# Altium PCB PCB1.PcbDoc (part 1 of 3)
Units mil, origin at the board's own origin, x right, y up, seen from the top; angles counter-clockwise.
Board outline 8600 x 11100 mil, 4 copper layers (CAPA1, GND, VCC, Capa2), stack 94.024 mil thick; 162 components, 68 nets, 413 pads, 138 vias.
Unrouted connection lines stored in the file: 33.
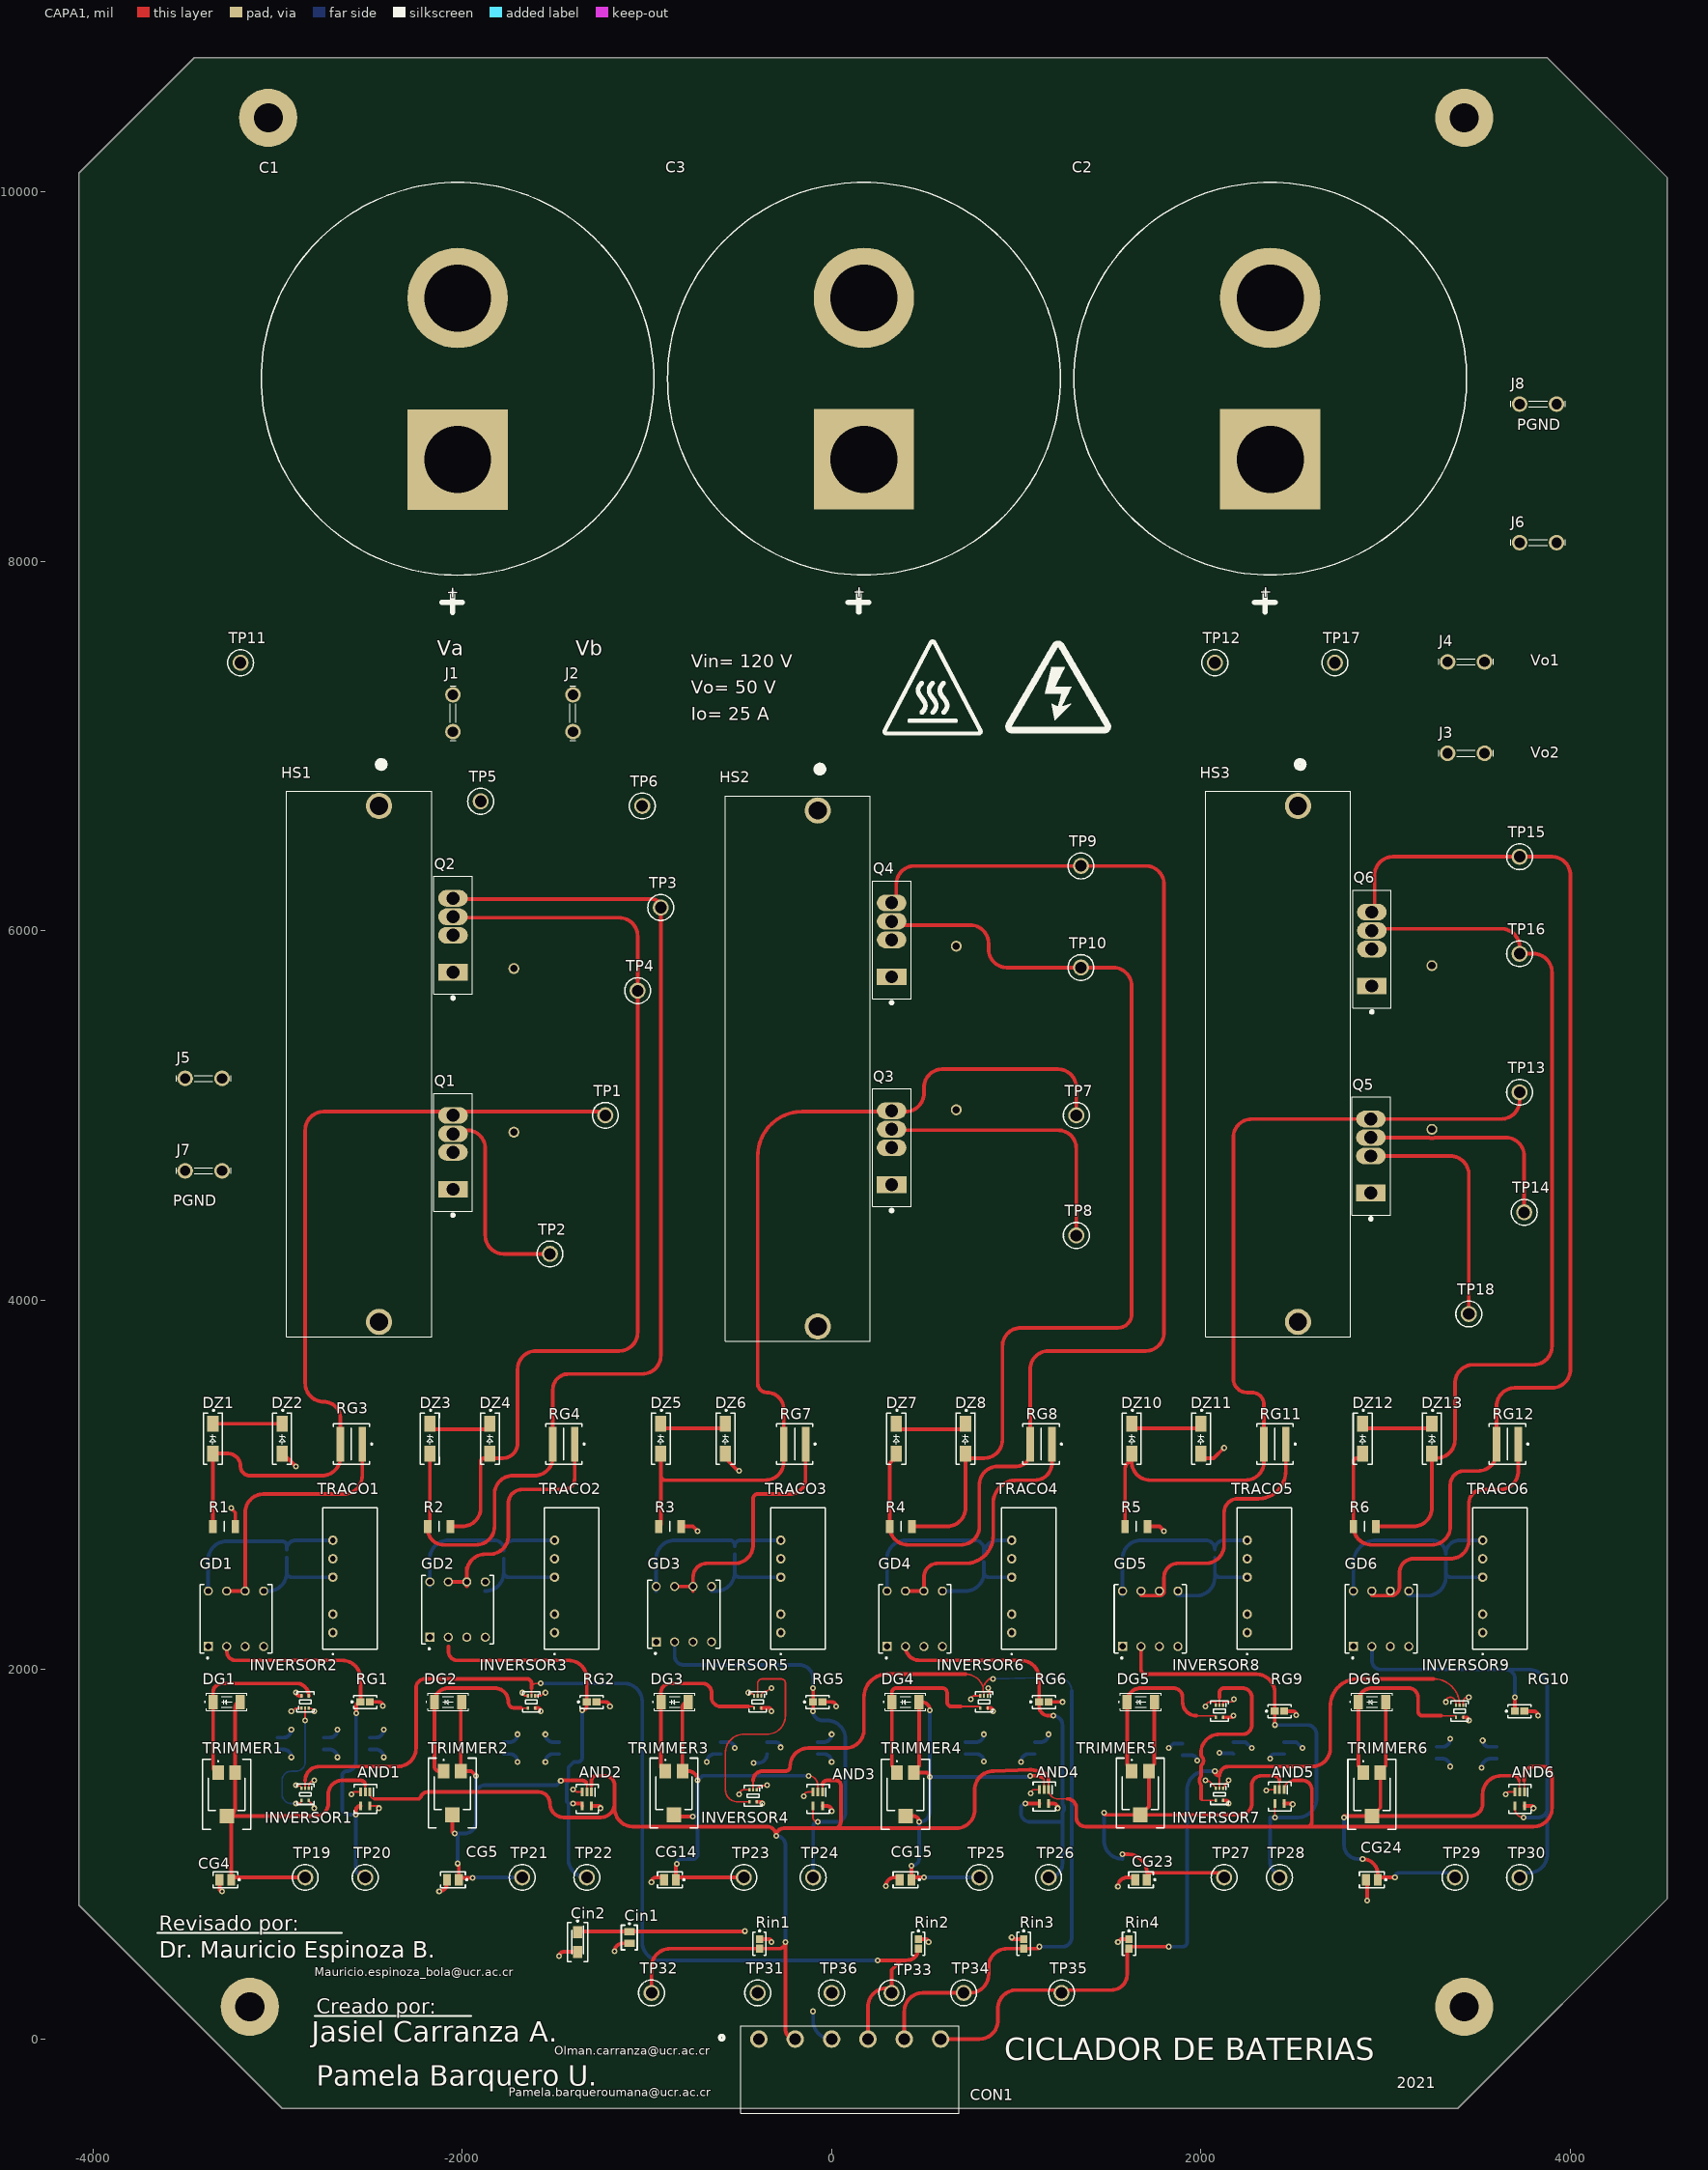
[diagram p0: CAPA1 view]
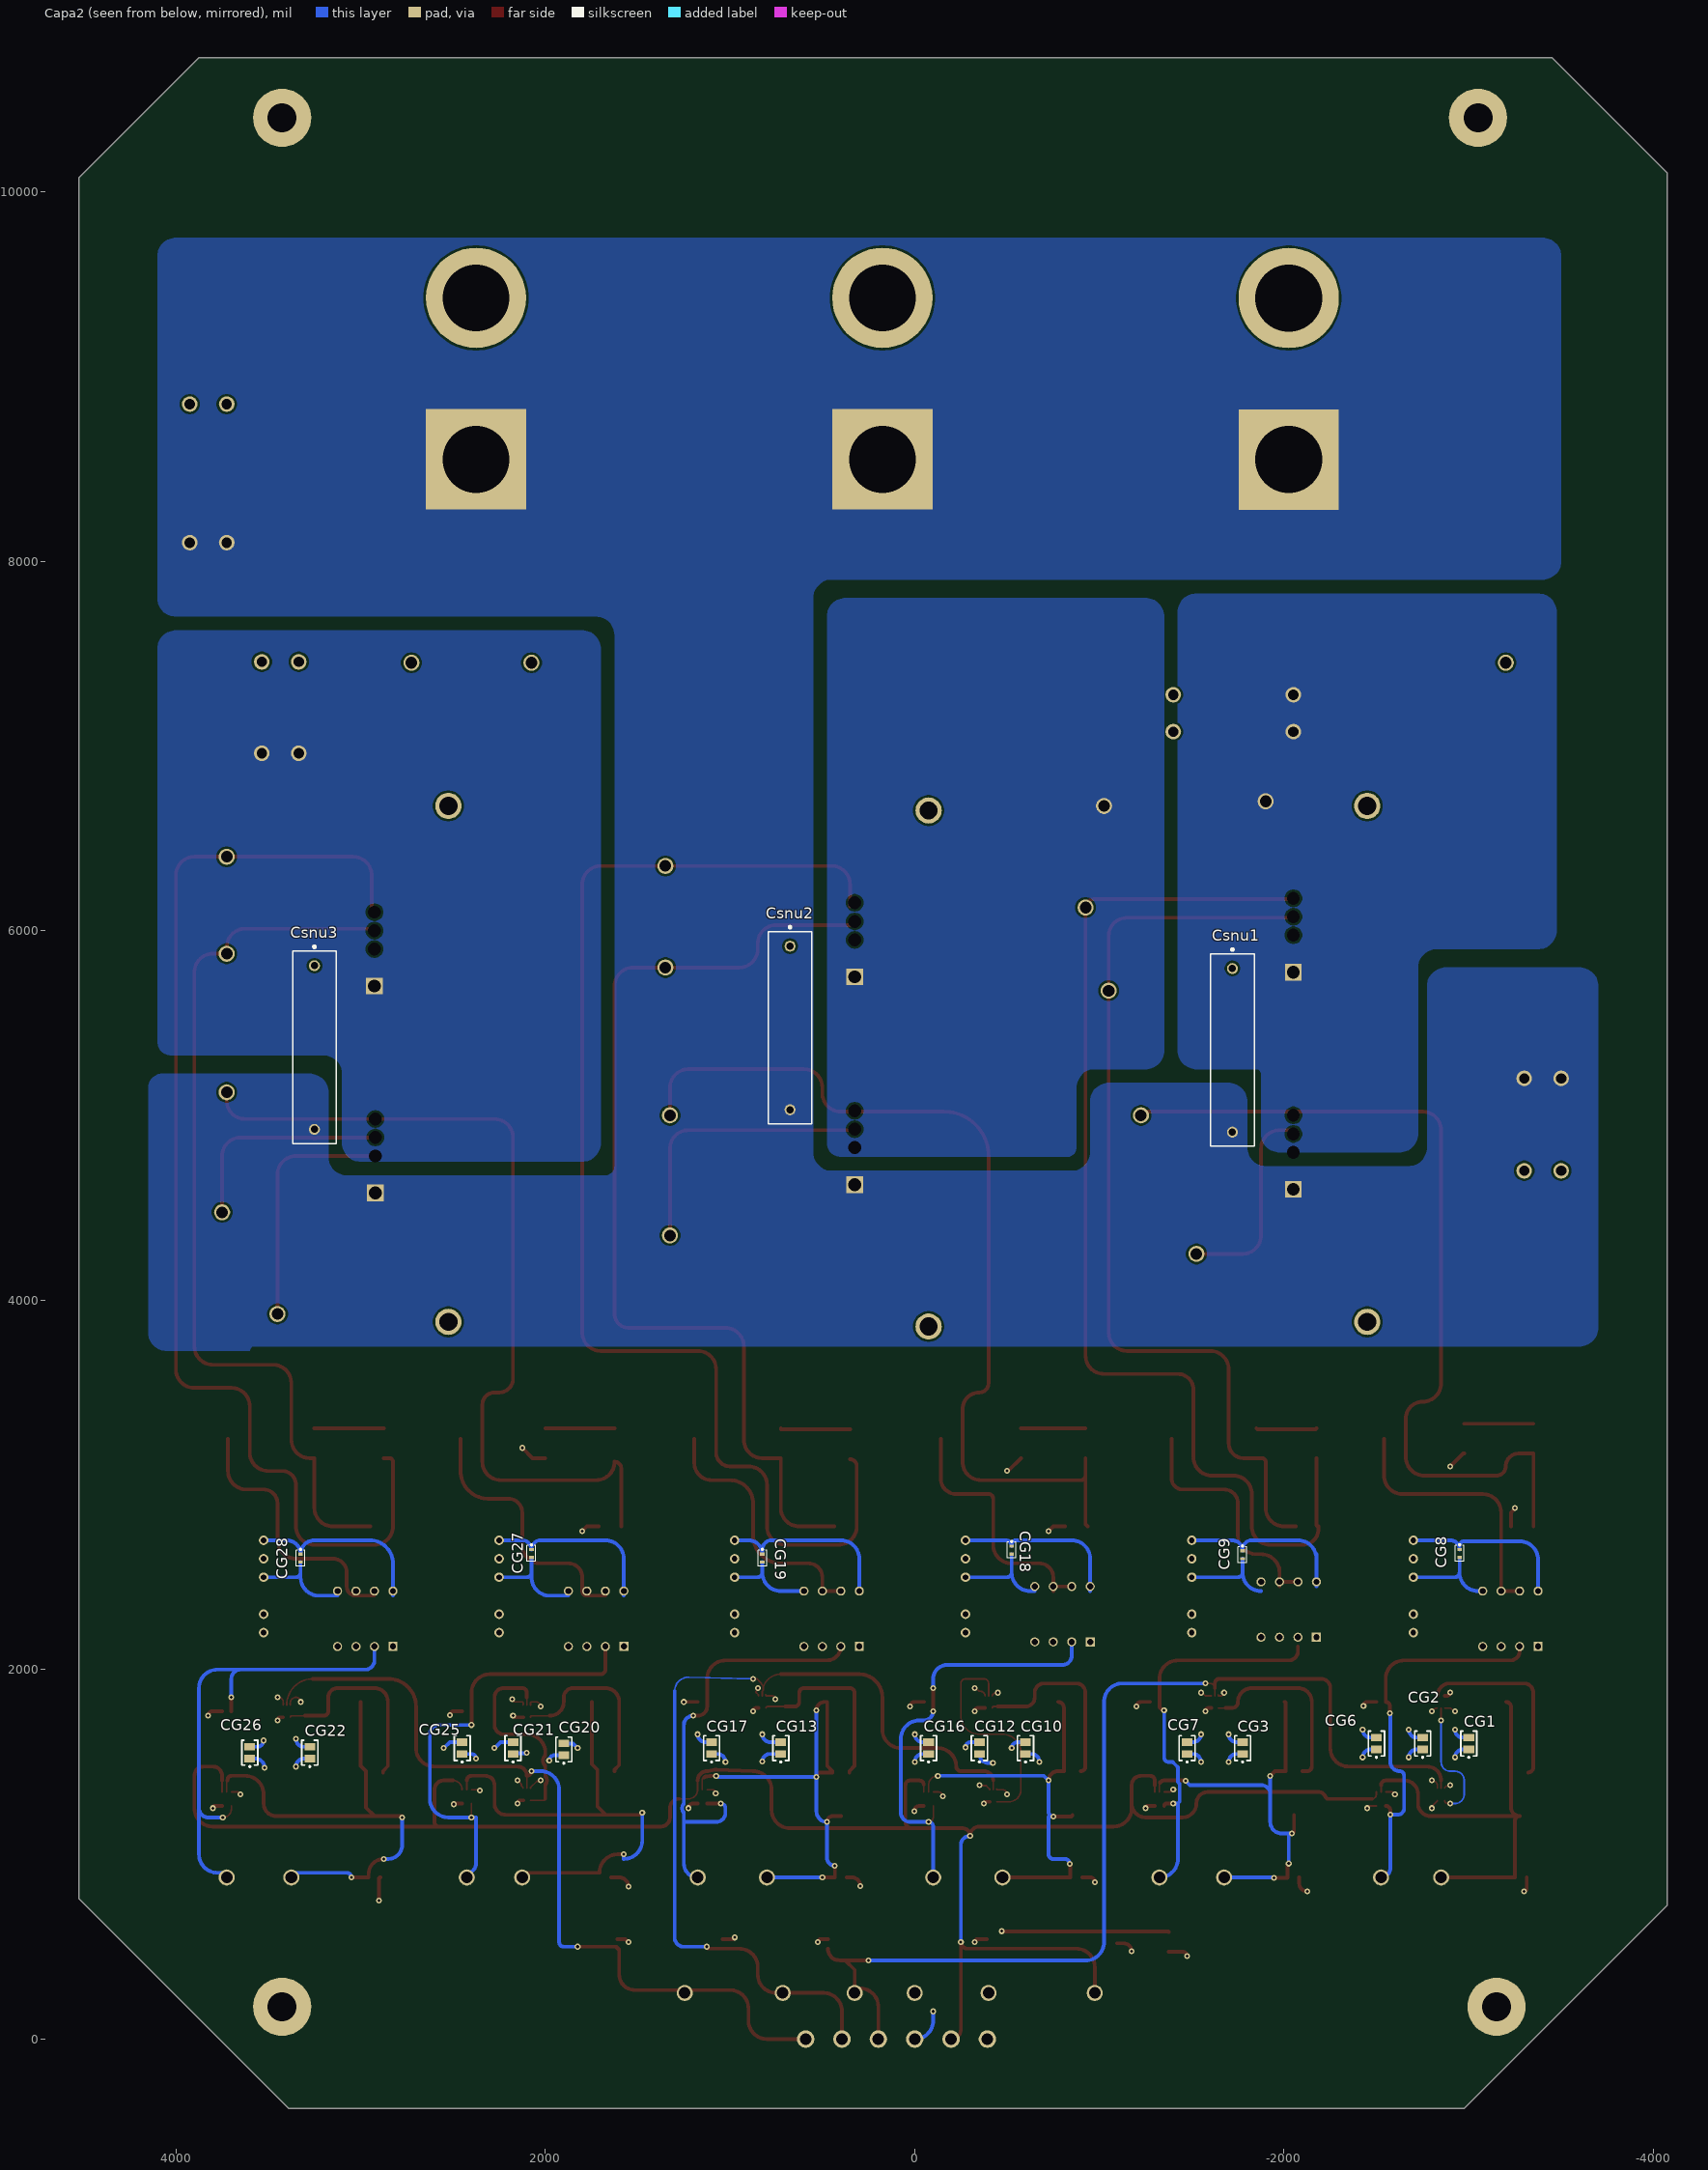
[diagram p1: Capa2 view, seen from below]
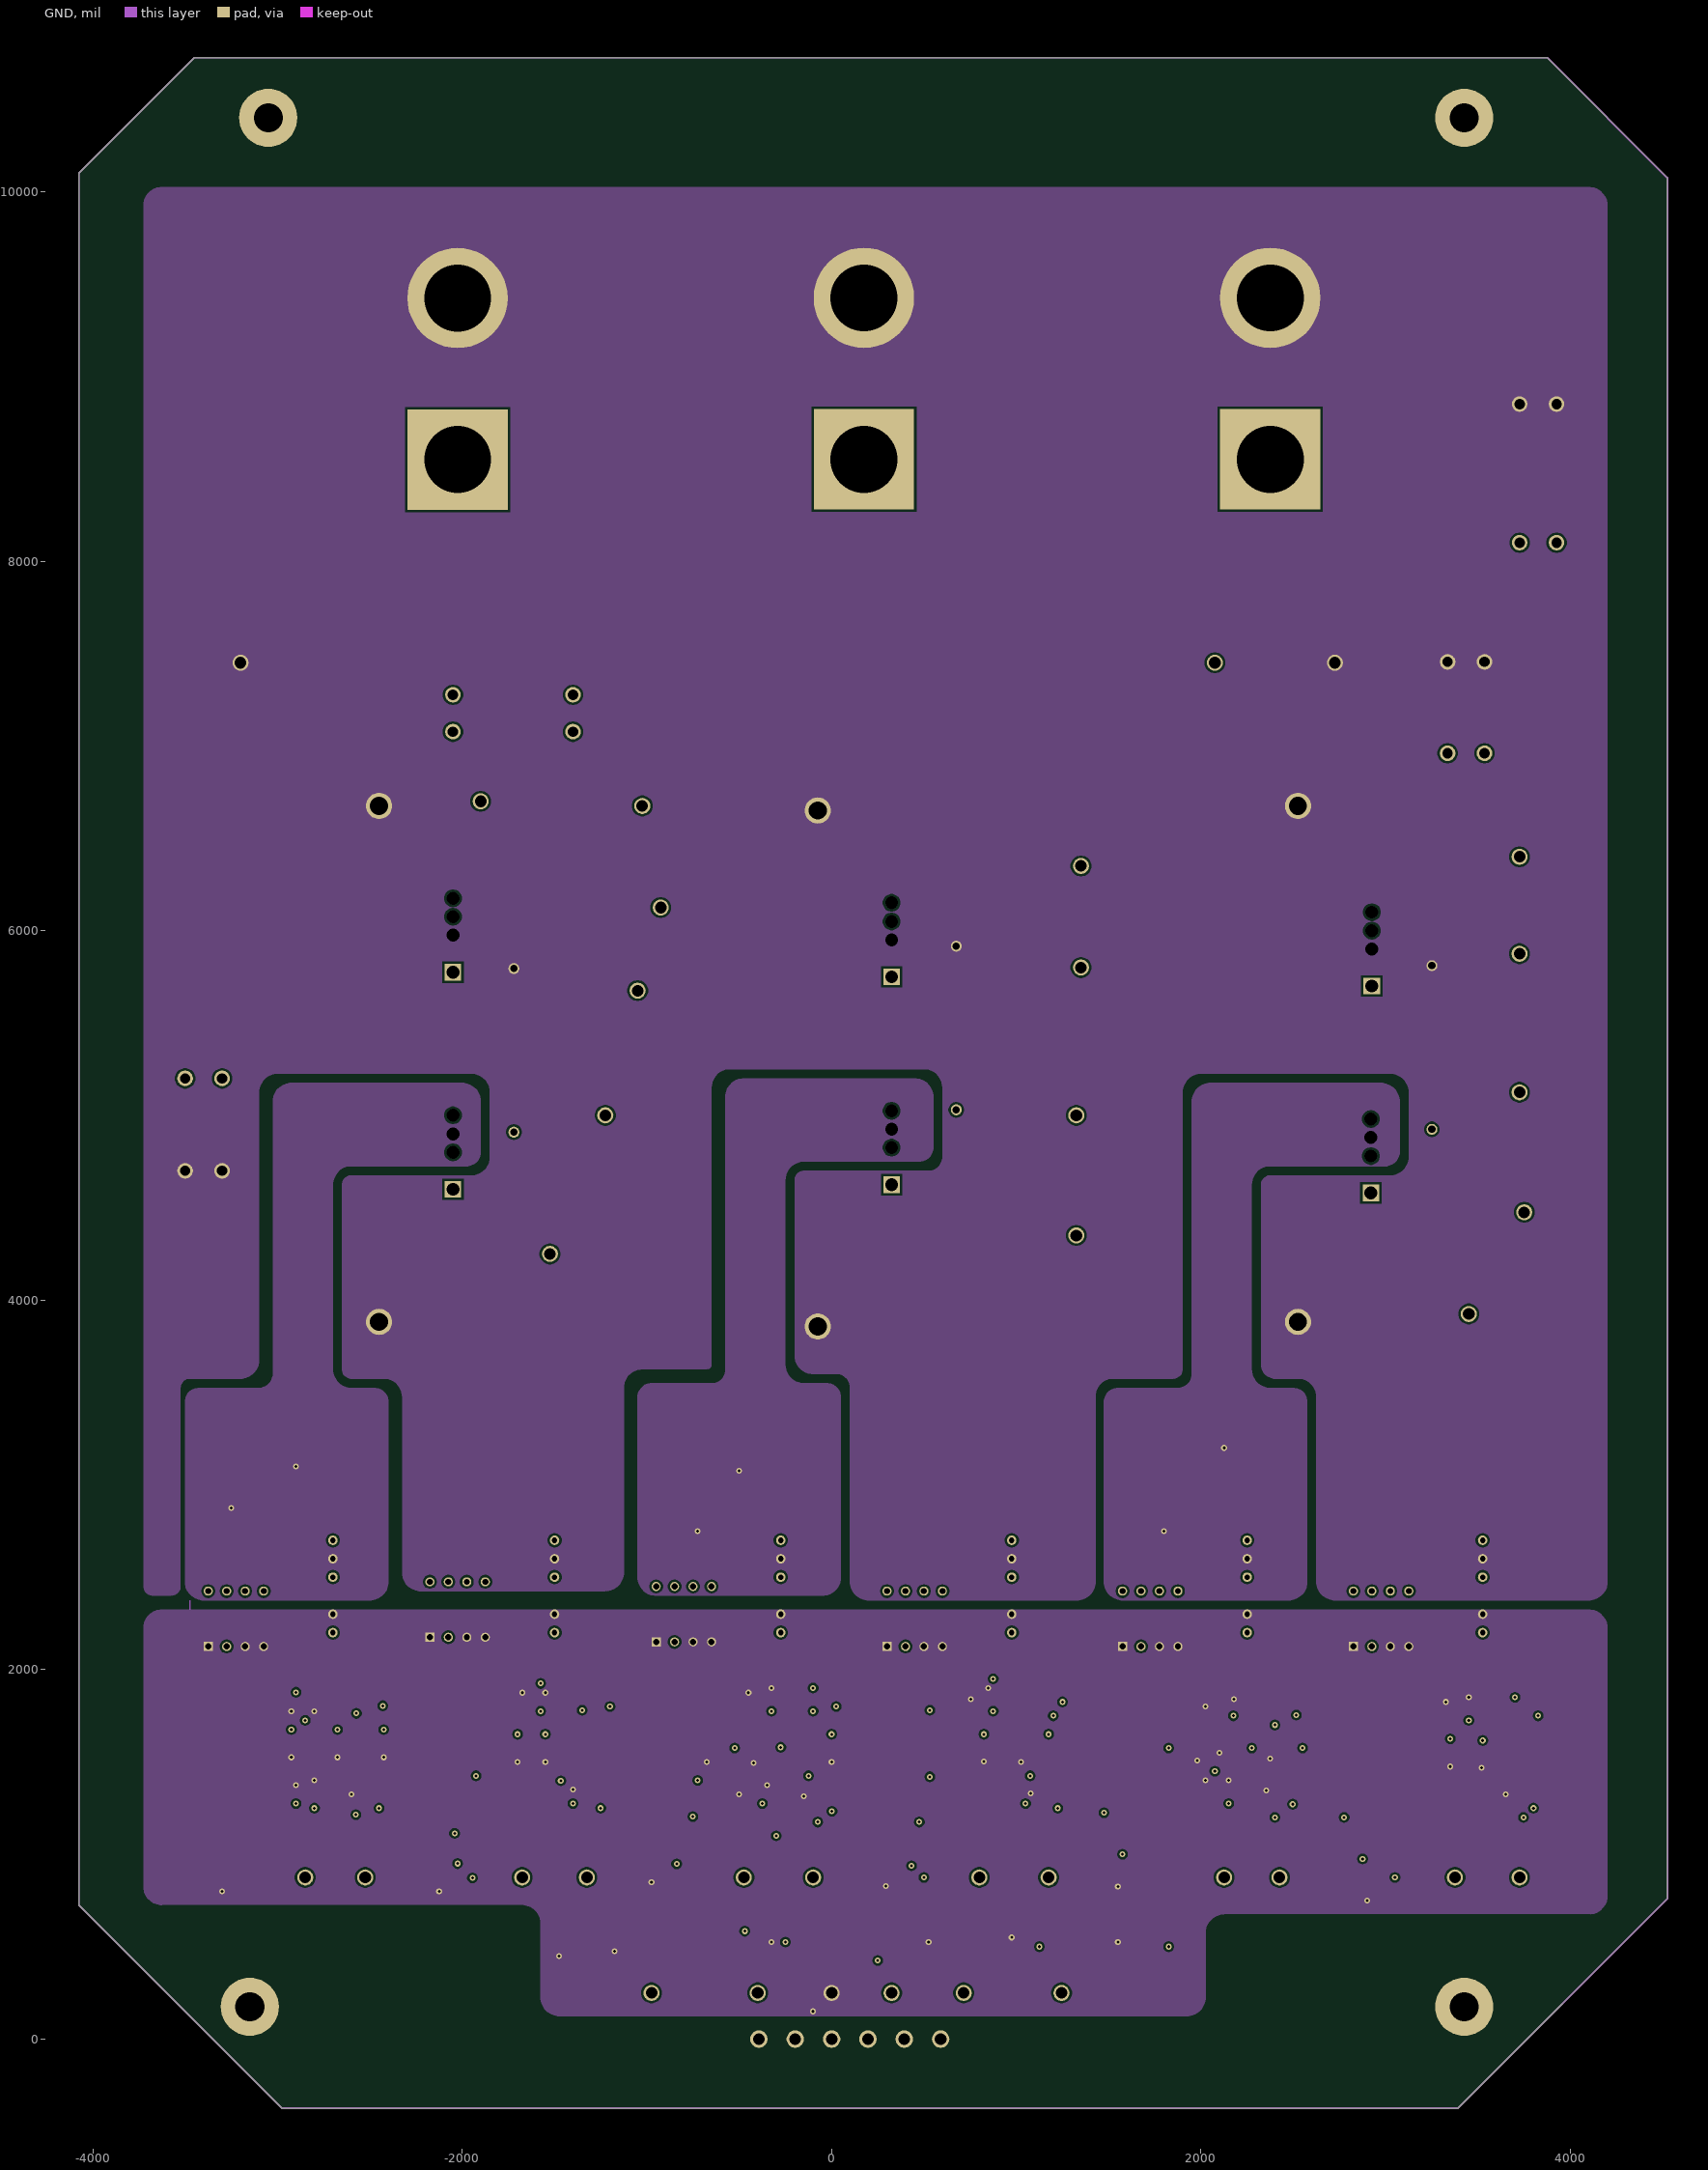
[diagram p2: GND]
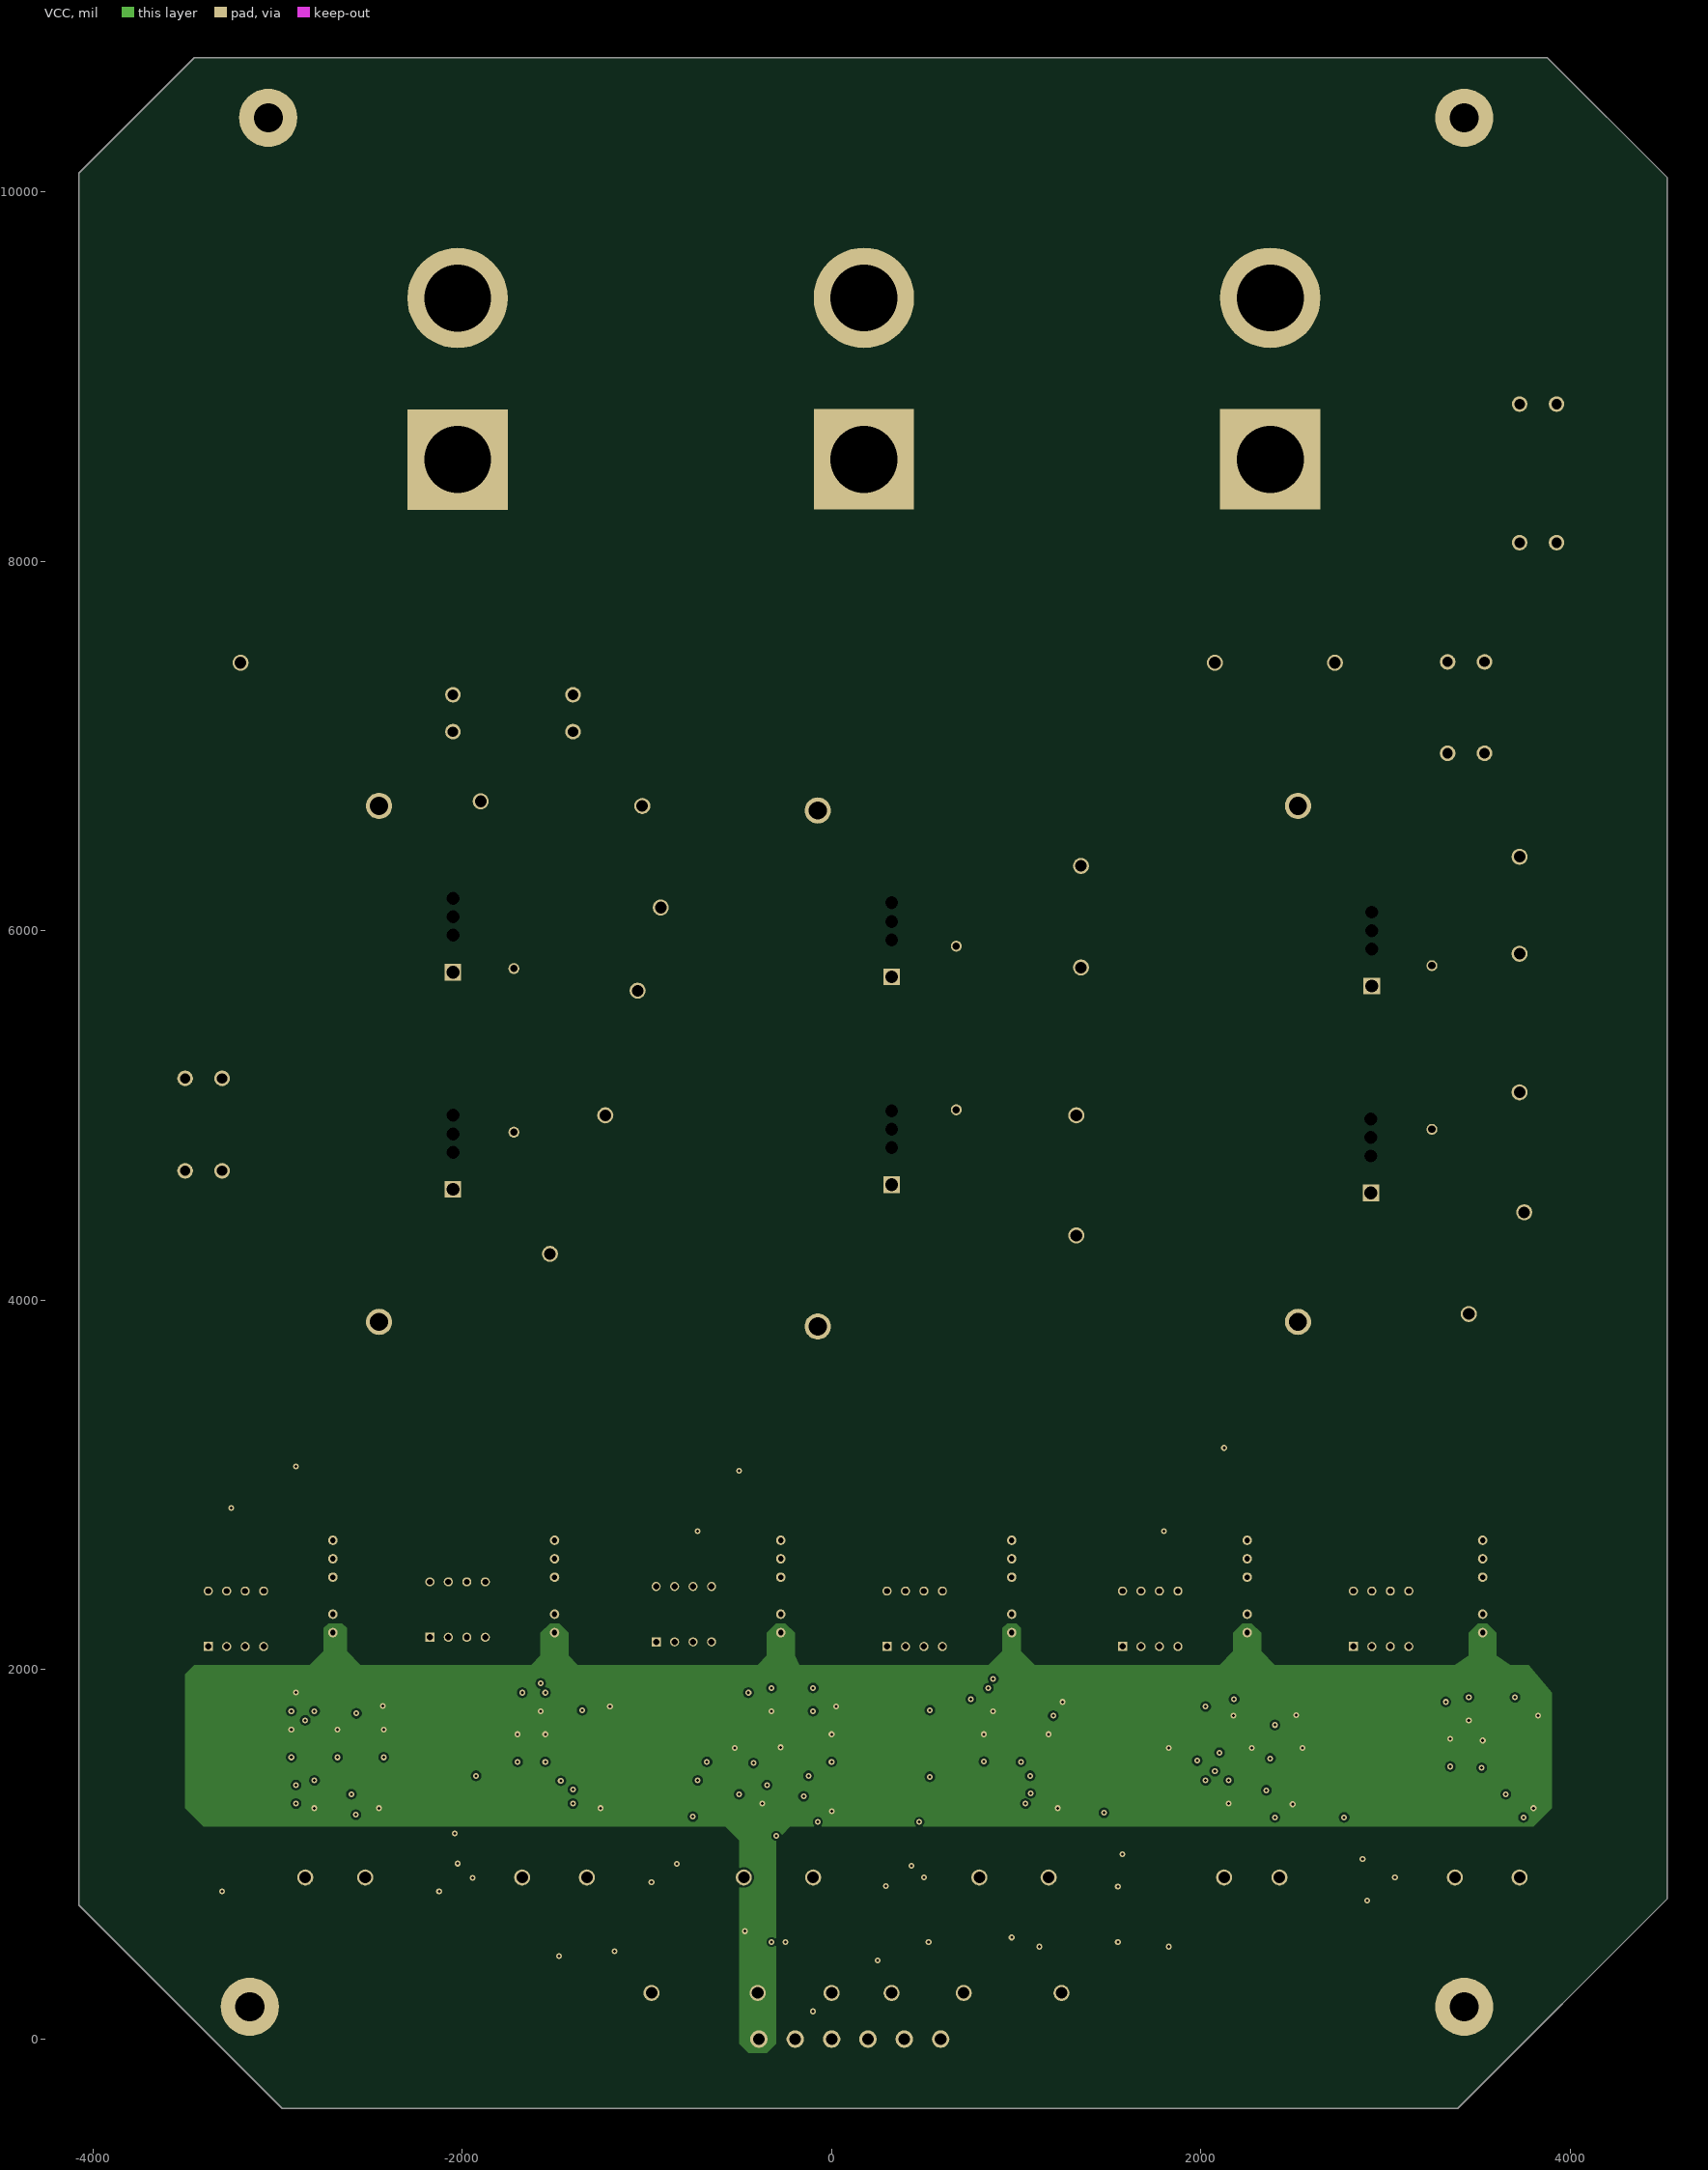
[diagram p3: VCC]
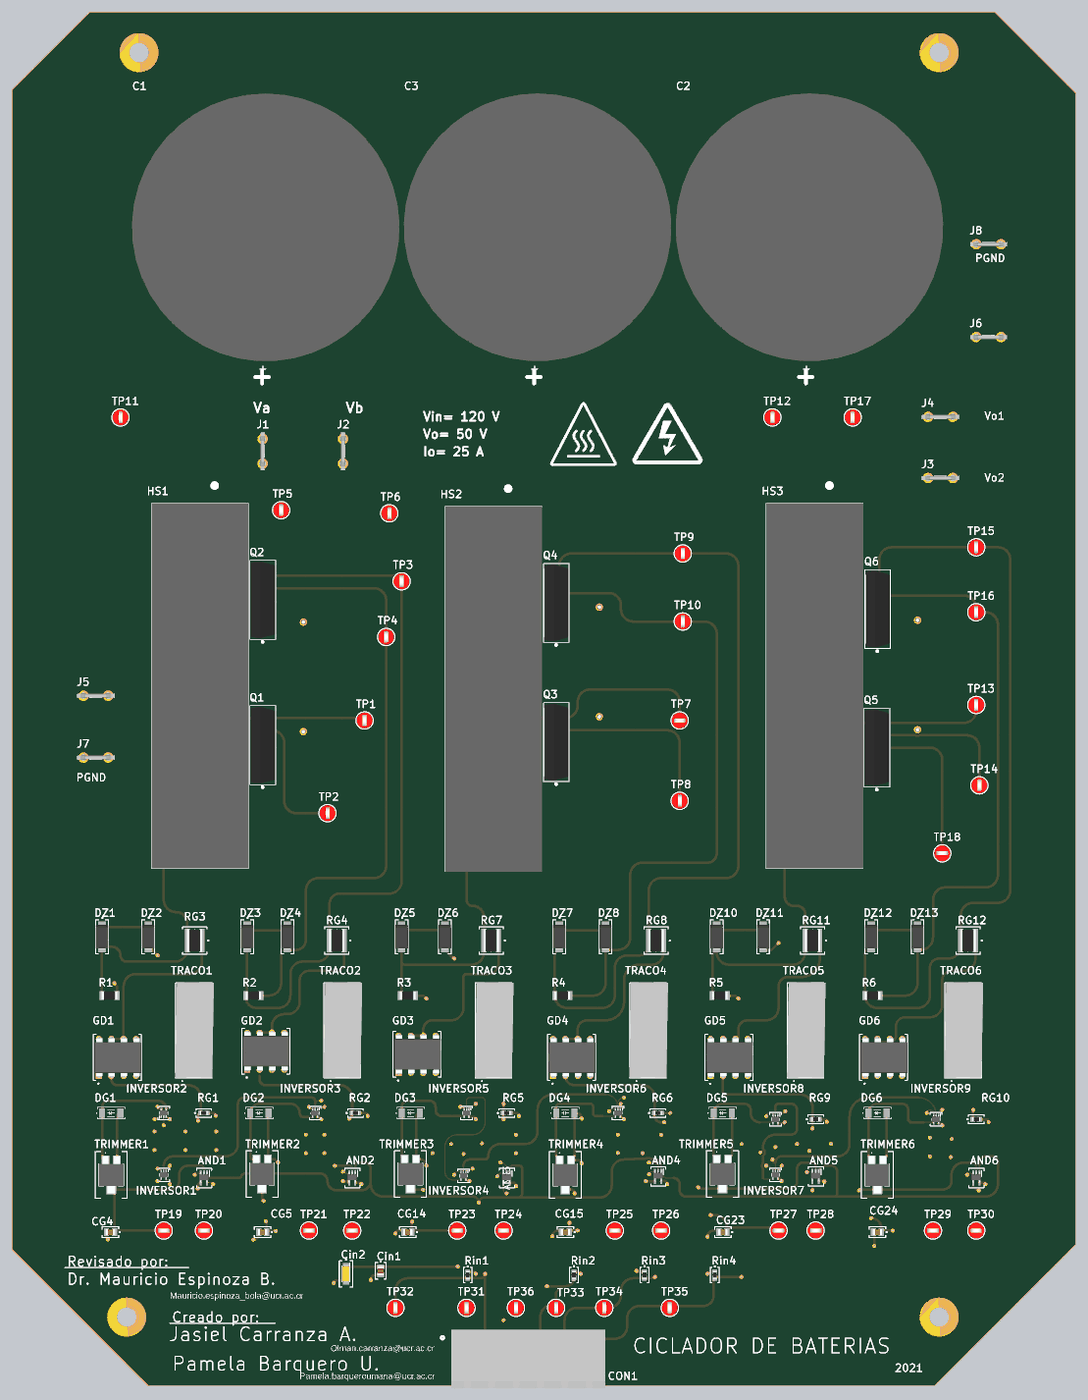
[diagram p5: 3D render of the assembled board from above, using the file's embedded part models]
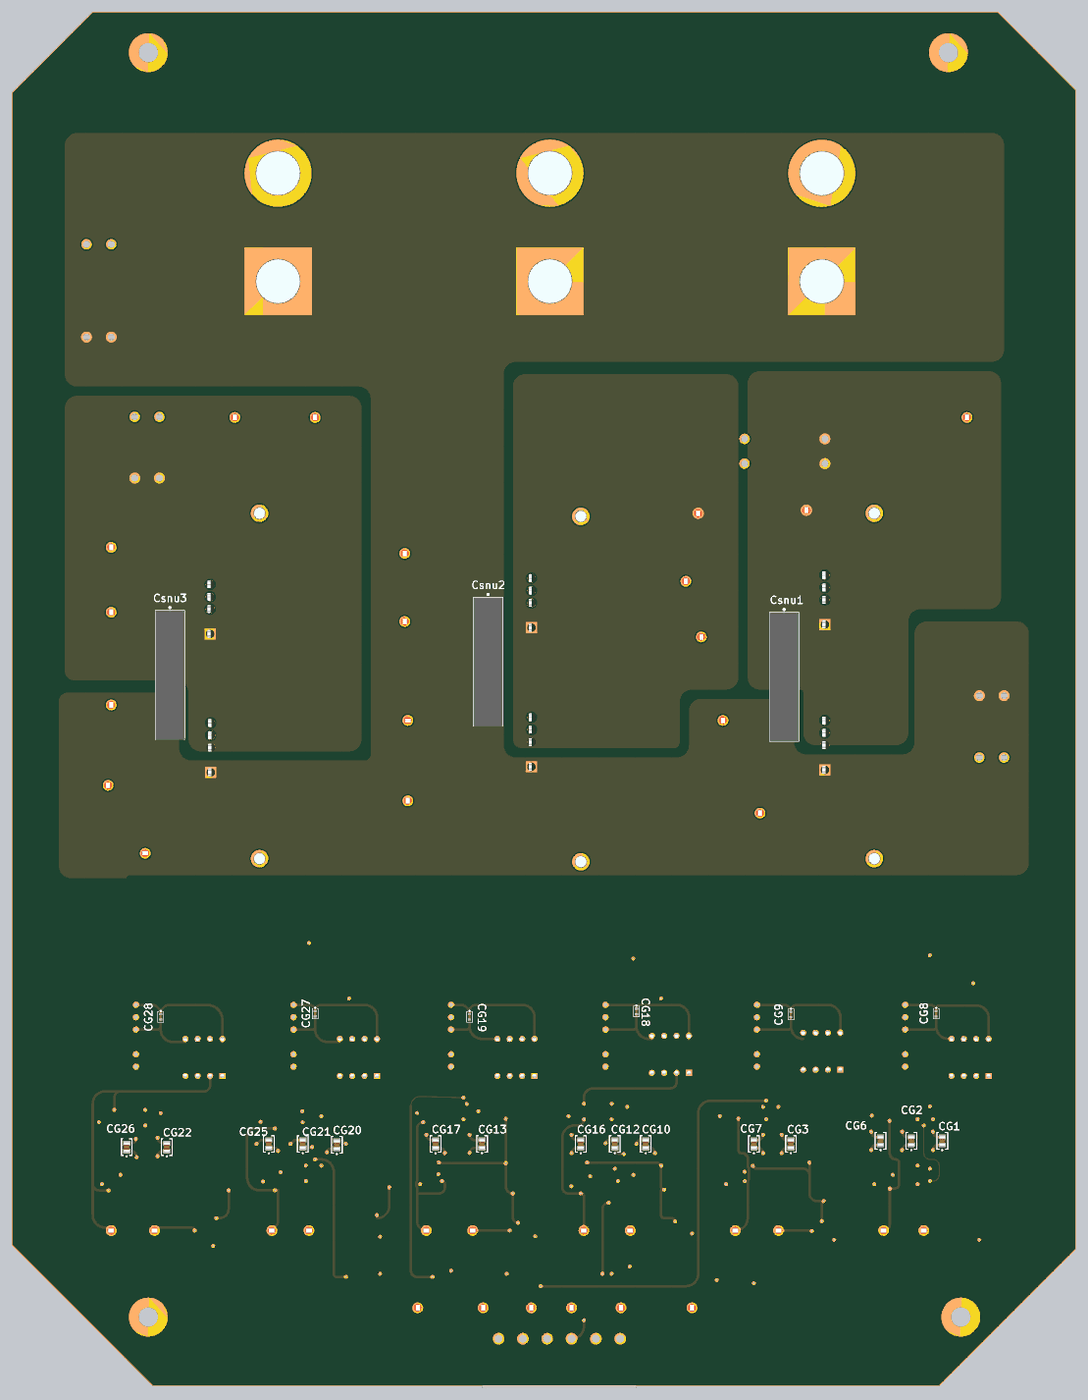
[diagram p6: 3D render of the assembled board from below, using the file's embedded part models]

## Layer stack, top to bottom
Top Solder: solder mask 0.4, Solder Resist, Dk 3.5
CAPA1: signal copper 2.7559
Dielectric 2: prepreg 12, PP-006, Dk 4.1
GND: signal copper 2.7559
Dielectric 1: core 59, FR-4, Dk 4.8
VCC: signal copper 2.7559
Dielectric 3: prepreg 12, PP-006, Dk 4.1
Capa2: signal copper 2.7559
Bottom Solder: solder mask 0.4, Solder Resist, Dk 3.5

## Board outline
-4075,725 -4075,10100 -3450,10725 3875,10725 4525,10075 4525,760.07 3389.93,-375 -2975,-375

## Design rules (kind name [scope] priority, off if disabled: settings)
AcuteAngle [All] p1: minimum=4.50000000000000E+0001 checktracksonly=FALSE
AssemblyTestPointUsage [All] p1: valid=2
BoardOutlineClearance BoardOutlineClearance_MountingHoles [OnCopper and InComponentClass('Mounting Holes')] p1: gap=40 ignorepadtopadclearanceinfootprint=FALSE
BoardOutlineClearance BoardOutlineClearance_Poly [OnCopper and IsPoly] p2: gap=25 ignorepadtopadclearanceinfootprint=FALSE
BoardOutlineClearance [OnCopper and Not InComponentClass('Logo') and not InComponentClass('FiducialMark') and not InRegion(1000,500,4000,800) and not InPoly] p3: gap=0 ignorepadtopadclearanceinfootprint=FALSE
Clearance Clearance_MH [InPadClass('mh')] p1: gap=59.06 ignorepadtopadclearanceinfootprint=FALSE except(0: Arc-Hole Track-Hole SMDPad-Hole THPad-Hole Via-Hole Fill-Hole Poly-Hole Region-Hole Text-Hole)
Clearance Clearance_HV_Bottom_Layer [InLayerClass('Bottom_Layer') and InPolygon vs InNetClass('HV_Class')] p2: gap=118.11 ignorepadtopadclearanceinfootprint=FALSE except(0: Arc-Hole Track-Hole SMDPad-Hole THPad-Hole Via-Hole Fill-Hole Poly-Hole Region-Hole Text-Hole)
Clearance Clearance_HV_TOP_Layer [InLayerClass('Top_Layer') and InPolygon vs InNetClass('HV_Class')] p3: gap=118.11 ignorepadtopadclearanceinfootprint=FALSE except(0: Arc-Hole Track-Hole SMDPad-Hole THPad-Hole Via-Hole Fill-Hole Poly-Hole Region-Hole Text-Hole)
Clearance Clearance_HV_PwrLayer [InLayerClass('PWR Class') and InPolygon vs InNetClass('HV_Class')] p4: gap=118.11 ignorepadtopadclearanceinfootprint=FALSE except(0: Arc-Hole Track-Hole SMDPad-Hole THPad-Hole Via-Hole Fill-Hole Poly-Hole Region-Hole Text-Hole)
Clearance Clearance_HV_GndLayer [InLayerClass('GND_Layer') and InPolygon vs InNetClass('HV_Class')] p5: gap=60 ignorepadtopadclearanceinfootprint=FALSE except(0: Arc-Hole Track-Hole SMDPad-Hole THPad-Hole Via-Hole Fill-Hole Poly-Hole Region-Hole Text-Hole)
Clearance "Clearance_Poly to Poly" [InPoly vs InPoly] p6: gap=25 ignorepadtopadclearanceinfootprint=FALSE except(0: Arc-Hole Track-Hole SMDPad-Hole THPad-Hole Via-Hole Fill-Hole Poly-Hole Region-Hole Text-Hole)
Clearance Clearance_Poly [InPolygon] p7: gap=12 ignorepadtopadclearanceinfootprint=FALSE except(0: Arc-Hole Track-Hole SMDPad-Hole THPad-Hole Via-Hole Fill-Hole Poly-Hole Region-Hole Text-Hole)
Clearance [All] p8: gap=7.87 ignorepadtopadclearanceinfootprint=FALSE except(0: Arc-Hole Track-Hole SMDPad-Hole THPad-Hole Via-Hole Fill-Hole Poly-Hole Region-Hole Text-Hole)
ComponentClearance ComponentClearance_MountingHoles_FiducialMarks [InComponentClass('Mounting Holes') vs InComponentClass('FiducialMark')] p1: gap=30 collisioncheckmode=3 verticalgap=10 showdistances=FALSE
ComponentClearance ComponentClearance_Shunt [InComponentClass('Header') vs InComponentClass('Shunt')] p2: gap=0 collisioncheckmode=3 verticalgap=0 showdistances=FALSE
ComponentClearance ComponentClearance_Logo [InComponentClass('Logo')] p3: gap=1 collisioncheckmode=3 verticalgap=1 showdistances=FALSE
ComponentClearance ComponentClearance_ScrewToNut [(HasFootprint('NY PMS 440 0025 PH')) vs (HasFootprint('Keystone_1902C'))] p4: gap=1 collisioncheckmode=3 verticalgap=1 showdistances=FALSE
ComponentClearance ComponentClearance_MountingHoles [InComponentClass('Mounting Holes')] p5: gap=30 collisioncheckmode=3 verticalgap=100000 showdistances=FALSE
ComponentClearance ComponentClearance_SmallPassives [HasFootprint('0201*') or HasFootprint('0402*') or HasFootprint('0508') or HasFootprint('0603*') or HasFootprint('0612') or HasFootprint('0805*') or HasFootprint('0815*') or HasFootprint('0830*') or HasFootprint('1206*') or HasFootprint('1210*') or HasFootprint('1808*') or HasFootprint('1812*') or HasFootprint('1825*') or HasFootprint('2010*') or HasFootprint('2220*') or HasFootprint('2225*') or HasFootprint('2512*') or HasFootprint('2728*') or HasFootprint('3518*') vs HasFootprint('0201*') or HasFootprint('0402*') or HasFootprint('0508') or HasFootprint('0603*') or HasFootprint('0612') or HasFootprint('0805*') or HasFootprint('0815*') or HasFootprint('0830*') or HasFootprint('1206*') or HasFootprint('1210*') or HasFootprint('1808*') or HasFootprint('1812*') or HasFootprint('1825*') or HasFootprint('2010*') or HasFootprint('2220*') or HasFootprint('2225*') or HasFootprint('2512*') or HasFootprint('2728*') or HasFootprint('3518*')] p6: gap=0 collisioncheckmode=3 verticalgap=0 showdistances=FALSE
ComponentClearance ComponentClearance_THtoSMT [IsThruComponent vs IsSMTComponent] p7: gap=0 collisioncheckmode=3 verticalgap=0 showdistances=FALSE
ComponentClearance ComponentClearance_THtoTH [IsThruComponent vs IsThruComponent] p8: gap=0 collisioncheckmode=3 verticalgap=0 showdistances=FALSE
ComponentClearance [All] p9: gap=0 collisioncheckmode=3 verticalgap=0 showdistances=FALSE
DiffPairsRouting [All] p1: maxlimit=10 minlimit=7.87 mostfreqgap=7.87 toplayer_minwidth=10 toplayer_maxwidth=10 toplayer_prefwidth=10 midlayer1_minwidth=10 midlayer1_maxwidth=10 midlayer1_prefwidth=10 midlayer2_minwidth=10 midlayer2_maxwidth=10 midlayer2_prefwidth=10 bottomlayer_minwidth=10 bottomlayer_maxwidth=10 bottomlayer_prefwidth=10 maxuncoupledlength=1000
FabricationTestPointUsage TestPointUsage [All] p1: valid=2 allowmultiple=FALSE
FabricationTestpoint Testpoint [All] p1: side=3 testpointundercomponent=TRUE minsize=40 maxsize=100 preferedsize=60 minholesize=0 maxholesize=40 preferedholesize=32 testpointgrid=1 allowsidetop=TRUE allowsidebottom=TRUE usegrid=TRUE gridtolerance=0.01
FanoutControl Fanout_LCC [IsLCC] p1: bgadir=Out bgaviamode=Centered fanoutstyle=Auto fanoutdirection=Alternating viagrid=1 // Fanout_LCC (Default Rule)
FanoutControl Fanout_BGA [IsBGA] p2: bgadir=Out bgaviamode=Centered fanoutstyle=Auto fanoutdirection=Alternating viagrid=1 // Fanout_BGA (Default Rule)
FanoutControl Fanout_Default [All] p4: bgadir=Out bgaviamode=Centered fanoutstyle=Auto fanoutdirection=Alternating viagrid=1 // Fanout_Default (Default Rule)
FanoutControl Fanout_Small [(CompPinCount < 5)] p5: bgadir=Out bgaviamode=Centered fanoutstyle=Auto fanoutdirection=OutThenIn viagrid=1 // Fanout_Small (Default Rule)
Height [All] p1: minheight=0 maxheight=4000 prefheight=500
HoleSize [All] p1: absolutevalues=TRUE maxlimit=1000 minlimit=7.87 maxpercent=80.000 minpercent=20.000
MinimumAnnularRing MinimumAnnularRing_ThermalPadVias [IsVia and InAnyComponent] p1: minimumring=5.91
MinimumAnnularRing [All] p2: minimumring=5.5
MinimumSolderMaskSliver MinimumSolderMaskSliver_Logo [InComponentClass('Logo') vs InComponentClass('Logo')] p1: minsoldermaskwidth=0.7
MinimumSolderMaskSliver [All] p2: minsoldermaskwidth=3.94
PlaneConnect [All] p1: planeconnectstyle=Direct reliefexpansion=10 reliefentries=4 reliefconductorwidth=10 reliefairgap=10
PolygonConnect [All] p1: connectstyle=Direct reliefconductorwidth=10 reliefentries=4 polygonreliefangle="90 Angle" airgapwidth=10
RoutingVias ThermalPadVias [IsVia and InAnyComponent] p1: holewidth=7.87 width=19.68 viastyle="Through Hole" minholewidth=7.87 minwidth=19.68 maxholewidth=12.99 maxwidth=23.62
RoutingVias [All] p2: holewidth=16 width=32 viastyle="Through Hole" minholewidth=12 minwidth=24 maxholewidth=28 maxwidth=52
SilkToSilkClearance SilkToSilkClearance_Pb-FreeLogo [(HasFootprint('Pb-Free_Overlay_Medium') OR HasFootprint('Pb-Free_Overlay_Small')) vs (HasFootprint('Pb-Free_Overlay_Medium') OR HasFootprint('Pb-Free_Overlay_Small'))] p1: silktosilkclearance=0
SilkToSilkClearance [All] p2: silktosilkclearance=4
SilkToSolderMaskClearance SilkToComponentPadClearance [(IsPad or IsFill or IsRegion) and InAnycomponent] p1: minsilkscreentomaskgap=5 clearancetoexposedcopper=TRUE
SilkToSolderMaskClearance "Silk to Solder Mask Opening" [All] p2: minsilkscreentomaskgap=4 clearancetoexposedcopper=FALSE
SolderMaskExpansion [All] p1: expansion=1.97 istentingtop=FALSE
Width [All] p1: maxlimit=100 minlimit=9 preferedwidth=20 checkconnectedcopper=TRUE
15 further rules are at their usual default settings.

## Classes and differential pairs
component class Power_Card: C1 C2 C3 Csnu1 Csnu2 Csnu3 DZ1 DZ2 DZ3 DZ4 DZ5 DZ6 DZ7 DZ8 DZ10 DZ11 DZ12 DZ13 HS1 HS2 HS3 J1 J2 J3 J4 J5 J6 J7 J8 L1 Q1 Q2 Q3 Q4 Q5 Q6 R1 R2 R3 R4 R5 R6 TP1 TP2 TP3 TP4 TP5 TP6 TP7 TP8 TP9 TP10 TP11 TP12 TP13 TP14 TP15 TP16 TP17 TP18
component class GateDrivers: AND1 AND2 AND3 AND4 AND5 AND6 CG1 CG2 CG3 CG4 CG5 CG6 CG7 CG8 CG9 CG10 CG12 CG13 CG14 CG15 CG16 CG17 CG18 CG19 CG20 CG21 CG22 CG23 CG24 CG25 CG26 CG27 CG28 DG1 DG2 DG3 DG4 DG5 DG6 GD1 GD2 GD3 GD4 GD5 GD6 INVERSOR1 INVERSOR2 INVERSOR3 INVERSOR4 INVERSOR5 INVERSOR6 INVERSOR7 INVERSOR8 INVERSOR9 RG1 RG2 RG3 RG4 RG5 RG6 RG7 RG8 RG9 RG10 RG11 RG12 TP19 TP20 TP21 TP22 TP23 TP24 TP25 TP26 TP27 TP28 TP29 TP30 TRIMMER1 TRIMMER2 TRIMMER3 TRIMMER4 TRIMMER5 TRIMMER6
component class FLYBACK: TRACO1 TRACO2 TRACO3 TRACO4 TRACO5 TRACO6
component class Entradas: Cin1 Cin2 CON1 Rin1 Rin2 Rin3 Rin4 TP31 TP32 TP33 TP34 TP35 TP36

## Components (designator, comment, footprint, x,y, rotation, side; value= is the part's Value field where it differs from the comment)
AND1 "SN74AHC1G09DCKR" SOT65P210X110-5N -2525,1300 r270 top
AND2 "SN74AHC1G09DCKR" SOT65P210X110-5N -1325,1300 r270 top
AND3 "SN74AHC1G09DCKR" SOT65P210X110-5N -75,1300 r270 top
AND4 "SN74AHC1G09DCKR" SOT65P210X110-5N 1150,1312.6 r270 top
AND5 "SN74AHC1G09DCKR" SOT65P210X110-5N 2425,1312.6 r270 top
AND6 "SN74AHC1G09DCKR" SOT65P210X110-5N 3725,1300 r270 top
C1 "3600 uF" CAPPRD2220W900D5400H8200 -2025,8550 r90 top
C2 "3600 uF" CAPPRD2220W900D5400H8200 2375,8550.98 r90 top
C3 "3600 uF" CAPPRD2220W900D5400H8200 175,8550.98 r90 top
CG1 "0.1 uF" CAPC2012X94N -3000,1600 r90 bottom
CG2 "0.1 uF" CAPC2012X94N -2750,1600 r90 bottom
CG3 "0.1 uF" CAPC2012X94N -1775,1575 r90 bottom
CG4 "1000 pF" CAPC2012X98N -3281.89,862.41 r180 top
CG5 "1000 pF" CAPC2012X98N -2050,862.41 r180 top
CG6 "0.1 uF" CAPC2012X94N -2500,1600 r90 bottom
CG7 "0.1 uF" CAPC2012X94N -1475,1575 r90 bottom
CG8 "CGA2B3X7R1V104M050BB_1" CAPC1005X55N -2950,2628.35 r270 bottom
CG9 "CGA2B3X7R1V104M050BB_1" CAPC1005X55N -1775,2621.65 r270 bottom
CG10 "0.1 uF" CAPC2012X94N -600,1575 r90 bottom
CG12 "0.1 uF" CAPC2012X94N -350,1575 r90 bottom
CG13 "0.1 uF" CAPC2012X94N 725,1575 r90 bottom
CG14 "1000 pF" CAPC2012X98N -875,862.41 r180 top
CG15 "1000 pF" CAPC2012X98N 400,862.41 r180 top
CG16 "0.1 uF" CAPC2012X94N -75,1575 r90 bottom
CG17 "0.1 uF" CAPC2012X94N 1100,1575 r90 bottom
CG18 "CGA2B3X7R1V104M050BB_1" CAPC1005X55N -525,2646.65 r270 bottom
CG19 "CGA2B3X7R1V104M050BB_1" CAPC1005X55N 825,2603.35 r270 bottom
CG20 "0.1 uF" CAPC2012X94N 1900,1568.11 r90 bottom
CG21 "0.1 uF" CAPC2012X94N 2175,1575 r90 bottom
CG22 "0.1 uF" CAPC2012X94N 3275,1550 r90 bottom
CG23 "1000 pF" CAPC2012X98N 1675,862.41 r180 top
CG24 "1000 pF" CAPC2012X98N 2925,862.41 r180 top
CG25 "0.1 uF" CAPC2012X94N 2450,1575 r90 bottom
CG26 "0.1 uF" CAPC2012X94N 3600,1550 r90 bottom
CG27 "CGA2B3X7R1V104M050BB_1" CAPC1005X55N 2075,2628.35 r270 bottom
CG28 "CGA2B3X7R1V104M050BB_1" CAPC1005X55N 3325,2603.35 r270 bottom
Cin1 "0.1 uF" CAPC2012X94N -1095,550 r270 top
Cin2 "10uF" "CAPPM3216X180N - DUPLICATE" -1375,525 r270 top
CON1 "2350513-6" 23505136 -393.7,0 r0 top
Csnu1 "0.22 uF" 224PPB250K -1720,5795 r270 bottom
Csnu2 "0.22 uF" 224PPB250K 675,5915.83 r270 bottom
Csnu3 "0.22 uF" 224PPB250K 3250,5810 r270 bottom
DG1 "BAS85-GS08" BAQ33GS08 -3275,1825 r0 top
DG2 "BAS85-GS08" BAQ33GS08 -2076.18,1825 r0 top
DG3 "BAS85-GS08" BAQ33GS08 -850,1825 r0 top
DG4 "BAS85-GS08" BAQ33GS08 400,1825 r0 top
DG5 "BAS85-GS08" BAQ33GS08 1673.82,1825 r0 top
DG6 "BAS85-GS08" BAQ33GS08 2926.18,1825 r0 top
DZ1 "SMA6J5.0A" DIOM5026X229N -3350,3250 r270 top
DZ2 "SMA6J5.0A" DIOM5026X229N -2975,3250 r270 top
DZ3 "SMA6J5.0A" DIOM5026X229N -2175,3250 r270 top
DZ4 "SMA6J5.0A" DIOM5026X229N -1850,3250 r270 top
DZ5 "SMA6J5.0A" DIOM5026X229N -925,3250 r270 top
DZ6 "SMA6J5.0A" DIOM5026X229N -575,3250 r270 top
DZ7 "SMA6J5.0A" DIOM5026X229N 350,3250 r270 top
DZ8 "SMA6J5.0A" DIOM5026X229N 725,3250 r270 top
DZ10 "SMA6J5.0A" DIOM5026X229N 1625,3250 r270 top
DZ11 "SMA6J5.0A" DIOM5026X229N 2000,3250 r270 top
DZ12 "SMA6J5.0A" DIOM5026X229N 2875,3250 r270 top
DZ13 "SMA6J5.0A" DIOM5026X229N 3250,3250 r270 top
GD1 "HCPL-3120" DIP762W65P254L965H470Q8N -3225,2275 r90 top
GD2 "HCPL-3120" DIP762W65P254L965H470Q8N -2025,2325 r90 top
GD3 "HCPL-3120" DIP762W65P254L965H470Q8N -800,2300 r90 top
GD4 "HCPL-3120" DIP762W65P254L965H470Q8N 450,2275 r90 top
GD5 "HCPL-3120" DIP762W65P254L965H470Q8N 1725,2275 r90 top
GD6 "HCPL-3120" DIP762W65P254L965H470Q8N 2975,2275 r90 top
HS1 "C247-075-3AE" C2470753AE -2450,6675 r270 top
HS2 "C247-075-3AE" C2470753AE -75,6650 r270 top
HS3 "C247-075-3AE" C2470753AE 2525,6675 r270 top
INVERSOR1 "SN74AHC1G14DRLR" SOTFL50P160X60-5N -2850,1325 r270 top
INVERSOR2 "SN74AHC1G14DRLR" SOTFL50P160X60-5N -2850,1825 r90 top
INVERSOR3 "SN74AHC1G14DRLR" SOTFL50P160X60-5N -1625,1825 r270 top
INVERSOR4 "SN74AHC1G14DRLR" SOTFL50P160X60-5N -425,1317.01 r270 top
INVERSOR5 "SN74AHC1G14DRLR" SOTFL50P160X60-5N -400,1825 r270 top
INVERSOR6 "SN74AHC1G14DRLR" SOTFL50P160X60-5N 825,1825 r270 top
INVERSOR7 "SN74AHC1G14DRLR" SOTFL50P160X60-5N 2100,1325 r270 top
INVERSOR8 "SN74AHC1G14DRLR" SOTFL50P160X60-5N 2100,1775 r270 top
INVERSOR9 "SN74AHC1G14DRLR" SOTFL50P160X60-5N 3400,1775 r270 top
J1 "" TE_62409-1 -2050,7176.75 r90 top
J2 "" TE_62409-1 -1400,7176.75 r90 top
J3 "" TE_62409-1 3435,6960 r0 top
J4 "" TE_62409-1 3435,7455 r0 top
J5 "" TE_62409-1 -3400,5200 r180 top
J6 "" TE_62409-1 3825,8100 r180 top
J7 "" TE_62409-1 -3400,4700 r0 top
J8 "" TE_62409-1 3825,8850 r0 top
Q1 "FCH041N60F" TO-247-4L_FCH041N60F -2050,4600 r90 top
Q2 "FCH041N60F" TO-247-4L_FCH041N60F -2050,5775 r90 top
Q3 "FCH041N60F" TO-247-4L_FCH041N60F 325,4625 r90 top
Q4 "FCH041N60F" TO-247-4L_FCH041N60F 325,5750 r90 top
Q5 "FCH041N60F" TO-247-4L_FCH041N60F 2920,4580 r90 top
Q6 "FCH041N60F" TO-247-4L_FCH041N60F 2925,5700 r90 top
R1 "#NAME?" RESC3216X70N -3288.98,2775 r180 top
R2 "#NAME?" RESC3216X70N -2125,2775 r180 top
R3 "#NAME?" RESC3216X70N -875,2775 r180 top
R4 "#NAME?" RESC3216X70N 375,2775 r180 top
R5 "#NAME?" RESC3216X70N 1650,2775 r180 top
R6 "#NAME?" RESC3216X70N 2886.02,2775 r180 top
RG1 "100 Ohm" RESC1608X55N -2525.59,1825 r0 top
RG2 "100 Ohm" RESC1608X55N -1299.41,1825 r0 top
RG3 "RCL121847R0JNEK_1" RESC3246X60N -2600,3220.47 r180 top
RG4 "RCL121847R0JNEK_1" RESC3246X60N -1450,3220.47 r180 top
RG5 "100 Ohm" RESC1608X55N -75.59,1825 r0 top
RG6 "100 Ohm" RESC1608X55N 1149.41,1825 r0 top
RG7 "RCL121847R0JNEK_1" RESC3246X60N -200,3220.47 r180 top
RG8 "RCL121847R0JNEK_1" RESC3246X60N 1134.06,3220.47 r180 top
RG9 "100 Ohm" RESC1608X55N 2425,1775 r0 top
RG10 "100 Ohm" RESC1608X55N 3725,1775 r0 top
RG11 "RCL121847R0JNEK_1" RESC3246X60N 2400,3220.47 r180 top
RG12 "RCL121847R0JNEK_1" RESC3246X60N 3659.06,3220.47 r180 top
Rin1 "4.7 KOhm" "RESC1608X55N - DUPLICATE" -390,515 r270 top
Rin2 "4.7 KOhm" "RESC1608X55N - DUPLICATE" 470,515 r270 top
Rin3 "4.7 KOhm" "RESC1608X55N - DUPLICATE" 1040,515 r270 top
Rin4 "4.7 KOhm" "RESC1608X55N - DUPLICATE" 1610,515 r270 top
TP1 "5010" KEYSTONE5010 -1225,5000 r180 top
TP2 "5010" KEYSTONE5010 -1525,4250 r180 top
TP3 "5010" KEYSTONE5010 -925,6125 r180 top
TP4 "5010" KEYSTONE5010 -1050,5675 r180 top
TP5 "5010" KEYSTONE5010 -1900,6700 r180 top
TP6 "5010" KEYSTONE5010 -1025,6675 r180 top
TP7 "5010" KEYSTONE5010 1325,5000 r270 top
TP8 "5010" KEYSTONE5010 1325,4350 r180 top
TP9 "5010" KEYSTONE5010 1350,6350 r180 top
TP10 "5010" KEYSTONE5010 1350,5800 r180 top
TP11 "5010" KEYSTONE5010 -3200,7450 r180 top
TP12 "5010" KEYSTONE5010 2075,7450 r180 top
TP13 "5010" KEYSTONE5010 3725,5125 r180 top
TP14 "5010" KEYSTONE5010 3750,4475 r180 top
TP15 "5010" KEYSTONE5010 3725,6400 r180 top
TP16 "5010" KEYSTONE5010 3725,5875 r180 top
TP17 "5010" KEYSTONE5010 2725,7450 r180 top
TP18 "5010" KEYSTONE5010 3450,3925 r270 top
TP19 "5010" KEYSTONE5010 -2850,875 r90 top
TP20 "5010" KEYSTONE5010 -2525,875 r90 top
TP21 "5010" KEYSTONE5010 -1675,875 r90 top
TP22 "5010" KEYSTONE5010 -1325,875 r90 top
TP23 "5010" KEYSTONE5010 -475,875 r90 top
TP24 "5010" KEYSTONE5010 -100,875 r90 top
TP25 "5010" KEYSTONE5010 800,875 r90 top
TP26 "5010" KEYSTONE5010 1175,875 r90 top
TP27 "5010" KEYSTONE5010 2125,875 r90 top
TP28 "5010" KEYSTONE5010 2425,875 r90 top
TP29 "5010" KEYSTONE5010 3375,875 r90 top
TP30 "5010" KEYSTONE5010 3725,875 r90 top
TP31 "5010" KEYSTONE5010 -400,250 r180 top
TP32 "5010" KEYSTONE5010 -975,250 r180 top
TP33 "5010" KEYSTONE5010 325,250 r180 top
TP34 "5010" KEYSTONE5010 715,250 r180 top
TP35 "5010" KEYSTONE5010 1245,250 r180 top
TP36 "5010" KEYSTONE5010 0,250 r180 top
TRACO1 "TMH_0515D" TMH0515D -2700,2200 r90 top
TRACO2 "TMH_0515D" TMH0515D -1500,2200 r90 top
TRACO3 "TMH_0515D" TMH0515D -275,2200 r90 top
TRACO4 "TMH_0515D" TMH0515D 975,2200 r90 top
TRACO5 "TMH_0515D" TMH0515D 2250,2200 r90 top
TRACO6 "TMH_0515D" TMH0515D 3525,2200 r90 top
TRIMMER1 "ST-4ETB203" ST4ETB203 -3275,1325 r180 top
TRIMMER2 "ST-4ETB203" ST4ETB203 -2053.74,1331.89 r180 top
TRIMMER3 "ST-4ETB203" ST4ETB203 -853.74,1331.89 r180 top
TRIMMER4 "ST-4ETB203" ST4ETB203 400,1325 r180 top
TRIMMER5 "ST-4ETB203" ST4ETB203 1671.26,1331.89 r180 top
TRIMMER6 "ST-4ETB203" ST4ETB203 2925,1325 r180 top

## Footprints (in the part's own frame and the unit in brackets; to place one, negate y for a bottom-side part, rotate by r counter-clockwise, add the part's x,y. Pads: shape width x height; smd on the part's side, far side on the other; paste and mask are expansions set on the pad)
224PPB250K [mm]
  round 1.5 hole 1: 1(0,0) 2(22.5,0)
  silkscreen extent -2.8,-3 24.45,3, body extent -2,-3 24.5,3, height 15.1
23505136 [mm]
  round 2.4 hole 1.6: 1(0,0) 2(5,0) 3(10,0) 4(15,0) 5(20,0) 6(25,0)
  silkscreen extent -5.51,-10.2 27.5,1.8, body extent -3.27,-10.14 28.33,1.86, height 8.28
BAQ33GS08 [mm]
  rect 1.25x2 smd: 1(-1.875,0) 2(1.875,0)
  silkscreen extent -3.06,-1.2 2.8,1.2
C2470753AE [mm]
  round 3.6 hole 2.5: 1(0,0) 2(70.94,0)
  silkscreen extent -6.46,-12.7 72.97,7.24, body extent -2.03,-12.7 72.97,7.24, height 38.1
CAPC1005X55N [mm]
  rect 0.42x0.62 smd: 1(-0.55,0) 2(0.55,0)
  silkscreen extent -1.3,-0.6 1.1,0.6, body extent -0.5,-0.25 0.5,0.25, height 0.55
CAPC2012X94N [mm]
  rect 1.02x1.47 smd: 1(-0.81,0) 2(0.81,0)
  silkscreen extent -2,-1.1 1.7,1.1, body extent -1,-0.63 1,0.63, height 0.94
CAPC2012X98N [mm]
  rect 1.1x1.57 smd: 1(-0.81,0) 2(0.81,0)
  silkscreen extent -2,-1.1 1.7,1.1, body extent -1,-0.63 1,0.63, height 0.98
"CAPPM3216X180N - DUPLICATE" [mm]
  rect 1.7x1.25 smd: 1(-1.35,0) 2(1.35,0)
  silkscreen extent -3,-1.4 2.7,1.4, body extent -1.6,-0.8 1.6,0.8, height 1.8
CAPPRD2220W900D5400H8200 [mm]
  rect 13.8x13.8 hole 9.2: 1(0,0)
  round 13.8 hole 9.2: 2(22.2,0)
  silkscreen extent -21,-27 38.1,27, body extent -16.4,-27.49 38.6,27.49, height 82
DIOM5026X229N [mm]
  rect 2.2x1.55 smd: 1(-2.05,0) 2(2.05,0)
  silkscreen extent -4,-1.3 3.5,1.3, body extent -2.52,-1.3 2.52,1.3, height 2.29
DIP762W65P254L965H470Q8N [mm]
  rect 1.25x1.25 hole 0.85: 1(-3.81,3.81)
  round 1.25 hole 0.85: 2(-3.81,1.27) 3(-3.81,-1.27) 4(-3.81,-3.81) 5(3.81,-3.81) 6(3.81,-1.27) 7(3.81,1.27) 8(3.81,3.81)
  silkscreen extent -5.5,-4.95 4.7,4.95, body extent -3.97,-4.92 3.97,4.73, height 4.7
KEYSTONE5010 [mil]
  round 87 hole 63: 1(0,0)
  silkscreen extent -70,-70 70,70, body extent -63,-63 63,62, height 319
RESC1608X55N [mm]
  rect 1.1x1 smd: 1(-0.65,0) 2(0.65,0)
  silkscreen extent -1.9,-0.9 1.6,0.9, body extent -0.8,-0.4 0.8,0.4, height 0.55
"RESC1608X55N - DUPLICATE" [mm]
  rect 1.1x1 smd: 1(-0.65,0) 2(0.65,0)
  silkscreen extent -1.9,-0.9 1.6,0.9, body extent -0.8,-0.4 0.8,0.4, height 0.55
RESC3216X70N [mm]
  rect 1.05x1.8 smd: 1(-1.55,0) 2(1.55,0)
  silkscreen extent 0,-0.7 0,0.7, body extent -1.6,-0.8 1.6,0.8, height 0.7
RESC3246X60N [mm]
  rect 1.05x4.8 smd: 1(-1.5,0) 2(1.5,0)
  silkscreen extent -2.9,-2.8 2.5,2.8, body extent -1.58,-2.3 1.58,2.3, height 0.6
SOT65P210X110-5N [mm]
  rect 1.2x0.4 smd: 1(-0.95,0.65) 2(-0.95,0) 3(-0.95,-0.65) 4(0.95,-0.65) 5(0.95,0.65)
  silkscreen extent -2,-1.5 2,1.6, body extent -1.2,-1 0.9,1, height 1.1
SOTFL50P160X60-5N [mm]
  rect 0.475x0.3 smd: 1(-0.838,0.5) 2(-0.838,0) 3(-0.838,-0.5) 4(0.838,-0.5) 5(0.838,0.5)
  silkscreen extent -1.4,-1.2 1.4,1.2, body extent -0.8,-0.8 0.8,0.8, height 0.6
ST4ETB203 [mm]
  rect 1.6x2 smd: 1(1.175,-3) 3(-1.175,-3)
  rect 2x2 smd: 2(0,3)
  silkscreen extent -3.3,-4.8 3.3,4.8, body extent -2.5,-3.84 2.5,3.8, height 2.7
TE_62409-1 [mm]
  round 2.145 hole 1.43: 1(-2.54,0) 1(2.54,0)
  silkscreen extent -3.75,-0.4 3.75,0.4, body extent -3.75,-0.4 3.75,0.4, height 12.64
TMH0515D [mm]
  round 1.303 hole 0.76: 1(0,0) 2(2.54,0) 4(7.62,0) 5(10.16,0) 6(12.7,0)
  silkscreen extent -3,-6.12 17.2,1.38, body extent -2.26,-6.5 17.37,1.44, height 10.2
TO-247-4L_FCH041N60F [mm]
  rect 2.29x4.06 / inner rect 2.286x2.286 / far side rect 2.286x2.286 hole 1.78 mask+0: 1(0,0)
  oval 2.29x4.06 / inner round 1.575 / far side round 1.575 hole 1.78 mask+0: 2(5.08,0) 3(7.62,0) 4(10.16,0)
  silkscreen extent -3.76,-2.68 13.18,2.61, body extent -2.82,-2.55 12.98,2.45, height 25.13

## Part data
AND1 AND2 AND3 AND4 AND5 AND6: "TEXAS INSTRUMENTS         SN74AHC1G09DCKR             AND Gate, ACH Family, 2 Input, 1 Gate, 25 mA, 2V to 5.5V, SC-70-5", Case/Package=SC, Low Level Output Current=8mA, Manufacturer="Texas Instruments", Max Operating Temperature=125°C, Max Supply Voltage=5.5V, Min Operating Temperature=-55°C, Min Supply Voltage=2V, Output Current=25mA, Package Quantity=3000, Quiescent Current=1uA, Supplier Part Number 1=296-29203-1-ND, Category="Logic Gates", ComponentLink1Description=https://datasheet.ciiva.com/1869/sn74ahc1g09-1869442.pdf?src-supplier=Digi-Key, ComponentLink1URL=https://datasheet.ciiva.com/1869/sn74ahc1g09-1869442.pdf?src-supplier=Digi-Key, ComponentLink2Description=https://datasheet.ciiva.com/4817/scls724b-115396-4817364.pdf?src-supplier=Mouser, ComponentLink2URL=https://datasheet.ciiva.com/4817/scls724b-115396-4817364.pdf?src-supplier=Mouser, ComponentLink3Description=https://datasheet.ciiva.com/1869/sn74ahc1g09-1869443.pdf?src-supplier=Digi-Key, ComponentLink3URL=https://datasheet.ciiva.com/1869/sn74ahc1g09-1869443.pdf?src-supplier=Digi-Key, ComponentLink4Description=https://datasheet.ciiva.com/1869/sn74ahc1g09-1869444.pdf?src-supplier=Digi-Key, ComponentLink4URL=https://datasheet.ciiva.com/1869/sn74ahc1g09-1869444.pdf?src-supplier=Digi-Key, ComponentLink5Description=https://datasheet.ciiva.com/14310/sn74ahc1g09-14310535.pdf?src-supplier=Avnet, ComponentLink5URL=https://datasheet.ciiva.com/14310/sn74ahc1g09-14310535.pdf?src-supplier=Avnet, ComponentLink6Description=https://datasheet.ciiva.com/41677/1864448-41677365.pdf?src-supplier=Newark, ComponentLink6URL=https://datasheet.ciiva.com/41677/1864448-41677365.pdf?src-supplier=Newark, Datasheet Link=http://www.ti.com/lit/gpn/sn74ahc1g09, Height=1.1mm, Lead Free="Lead Free", Logic Function="AND GATE", Manufacturer Part Number=SN74AHC1G09DCKR, Manufacturer_Name="Texas Instruments", Manufacturer_Part_Number=SN74AHC1G09DCKR, Mount="Surface Mount", Number of Bits=1, Number of Circuits=1, Number of Elements=1, Number of Gates=1, Number of Inputs=2, Number of Outputs=1, Number of Pins=5, Output Voltage=5.5V, Packaging="Tape and Reel", Pricing 1="1=0.40000, 10=0.29700, 25=0.25960, 100=0.16810, 250=0.13912, 500=0.11130, 1000=0.08533 (USD)", Propagation Delay=7.5ns, Radiation Hardening=No, REACH SVHC="No SVHC", RoHS=Yes, RoHS Compliant=Yes, Series=74AHC, Stock 1=19244, Supplier 1=Digi-Key, Technology=CMOS
C1 C2 C3: library part ALS70A362KE250, "Capacitor Polarised", Manufacturer_Name=Kemet, Datasheet Link=https://www.mouser.co.cr/ProductDetail/KEMET/ALS70A362KE250?qs=%2Fha2pyFaduj3AQ8COxkE8lI%252BUillJnwqd3tsmY5wFt8h31rq7v%2FTZw%3D%3D, Height=82mm, Manufacturer_Part_Number=ALS70A362KE250
CG1 CG2 CG3 CG6 CG7 CG10 CG12 CG13 CG16 CG17 CG20 CG21 CG22 CG25 CG26 Cin1: library part 0805YC104KAT2A, "Multilayer Ceramic Capacitors MLCC - SMD/SMT 16V .1uF X7R 0805 10%", Capacitance=100nF, Case Code (Imperial)=0805, Case Code (Metric)=2012, Dielectric=X7R, Insulation Resistance=100GR, Manufacturer="Kyocera AVX", Manufacturer_Name=AVX, Max Operating Temperature=125°C, Min Operating Temperature=-55°C, Mouser Part Number=581-0805YC104K, Package Quantity=1, Supplier Part Number 1=478-7961-1-ND, Tolerance=10%, Voltage Rating=16V, Arrow Part Number=0805YC104KAT2A, Arrow Price/Stock=https://www.arrow.com/en/products/0805yc104kat2a/avx, Case/Package=0805, Category="Ceramic Capacitors", ComponentLink1Description=https://datasheet.ciiva.com/206/cx7r-206011.pdf?src-supplier=Digi-Key, ComponentLink1URL=https://datasheet.ciiva.com/206/cx7r-206011.pdf?src-supplier=Digi-Key, ComponentLink2Description=https://datasheet.ciiva.com/5418/cx7r-5418479.pdf?src-supplier=Mouser, ComponentLink2URL=https://datasheet.ciiva.com/5418/cx7r-5418479.pdf?src-supplier=Mouser, ComponentLink3Description=https://datasheet.ciiva.com/2988/cx7r-2988050.pdf?src-supplier=Avnet, ComponentLink3URL=https://datasheet.ciiva.com/2988/cx7r-2988050.pdf?src-supplier=Avnet, ComponentLink4Description=https://datasheet.ciiva.com/14906/cx7r-14906278.pdf?src-supplier=Digi-Key, ComponentLink4URL=https://datasheet.ciiva.com/14906/cx7r-14906278.pdf?src-supplier=Digi-Key, ComponentLink5Description=https://datasheet.ciiva.com/15212/getdatasheetpartid-150472-15212621.pdf?src-supplier=Verical, ComponentLink5URL=https://datasheet.ciiva.com/15212/getdatasheetpartid-150472-15212621.pdf?src-supplier=Verical, ComponentLink6Description=https://datasheet.ciiva.com/28613/1679506-28613143.pdf?src-supplier=Element14, ComponentLink6URL=https://datasheet.ciiva.com/28613/1679506-28613143.pdf?src-supplier=Element14, ComponentLink7Description=https://datasheet.ciiva.com/16623/cx7r-16623414.pdf?src-supplier=Avnet+Europe, ComponentLink7URL=https://datasheet.ciiva.com/16623/cx7r-16623414.pdf?src-supplier=Avnet+Europe, Construction=Flat, Datasheet Link=https://spicat.avx.com/product/mlcc/chartview/0805YC104KAT2A/DataSheet/X7R, Depth=1.25mm, Dissipation Factor=12.5%, Height=0.94mm, Lead Free="Lead Free", Length=2.01mm, Manufacturer Part Number=0805YC104KAT2A, Manufacturer_Part_Number=0805YC104KAT2A, Mount="Surface Mount", Mouser Price/Stock=https://www.mouser.co.uk/ProductDetail/AVX/0805YC104KAT2A?qs=0j3vzYx9OgS3bRufCc82qg%3D%3D, Number of Pins=2, Packaging="Tape and Reel", Pricing 1="1=0.30000, 10=0.20700, 50=0.12420, 100=0.10490, 500=0.07176, 1000=0.06348 (USD)", Radiation Hardening=No, REACH SVHC="No SVHC", RoHS=Yes, RoHS Compliant=Yes, Series=-, Stock 1=61419, Supplier 1=Digi-Key, Termination=SMD/SMT, Thickness=0.037inch, Voltage Rating (DC)=16V, Width=0.049inch
CG4 CG14 CG23: library part C0805Y102K3RACTU, "Multilayer Ceramic Capacitors MLCC - SMD/SMT 25volts 1000pF 10% X7R", Capacitance=1nF, Case Code (Imperial)=0805, Case Code (Metric)=2012, Dielectric=X7R, Dielectric Material=Ceramic, Manufacturer=KEMET, Manufacturer_Name=Kemet, Max Operating Temperature=125°C, Min Operating Temperature=-55°C, Mouser Part Number=80-C0805Y102K3R, Supplier Part Number 1=399-15433-1-ND, Tolerance=10%, Voltage Rating (DC)=25V, Case/Package=0805, Category=Capacitors, ComponentLink1Description=http://www.mouser.com/ds/2/212/KEM_C1015_X7R_FF-CAP_SMD-1101148.pdf?src-supplier=Mouser, ComponentLink1URL=http://www.mouser.com/ds/2/212/KEM_C1015_X7R_FF-CAP_SMD-1101148.pdf?src-supplier=Mouser, Datasheet Link=https://www.kemet.com/specsheet/C0805Y102K3RACTU, Height=0.98mm, Manufacturer Part Number=C0805Y102K3RACTU, Manufacturer_Part_Number=C0805Y102K3RACTU, Mouser Price/Stock=https://www.mouser.com/Search/Refine.aspx?Keyword=80-C0805Y102K3R, Packaging="Tape and Reel", Pricing 1="1=0.43000, 10=0.30100, 50=0.30100, 100=0.18100, 1000=0.11400, 10000=0.10200 (USD)", RoHS=Yes, RoHS Compliant=Yes, Series=C0805Y, Stock 1=8015, Supplier 1=Digi-Key, Termination=SMD/SMT, Weight=0.000194oz
CG5 CG15 CG24: library part C0805Y102K3RACTU, "Multilayer Ceramic Capacitors MLCC - SMD/SMT 25volts 1000pF 10% X7R", Capacitance=1nF, Case Code (Imperial)=0805, Case Code (Metric)=2012, Dielectric=X7R, Dielectric Material=Ceramic, Manufacturer=KEMET, Manufacturer_Name=Kemet, Max Operating Temperature=125°C, Min Operating Temperature=-55°C, Mouser Part Number=80-C0805Y102K3R, Tolerance=10%, Voltage Rating (DC)=25V, Case/Package=0805, Category=Capacitors, ComponentLink1Description=http://www.mouser.com/ds/2/212/KEM_C1015_X7R_FF-CAP_SMD-1101148.pdf?src-supplier=Mouser, ComponentLink1URL=http://www.mouser.com/ds/2/212/KEM_C1015_X7R_FF-CAP_SMD-1101148.pdf?src-supplier=Mouser, Datasheet Link=https://www.kemet.com/specsheet/C0805Y102K3RACTU, Height=0.98mm, Manufacturer Part Number=C0805Y102K3RACTU, Manufacturer_Part_Number=C0805Y102K3RACTU, Mouser Price/Stock=https://www.mouser.com/Search/Refine.aspx?Keyword=80-C0805Y102K3R, Packaging="Tape and Reel", Pricing 1="1=0.43000, 10=0.30100, 50=0.30100, 100=0.18100, 1000=0.11400, 10000=0.10200 (USD)", RoHS=Yes, RoHS Compliant=Yes, Series=C0805Y, Stock 1=8015, Supplier 1=Mouser, Supplier Part Number 1=80-C0805Y102K3R, Termination=SMD/SMT, Weight=0.000194oz
CG8 CG9 CG18 CG19 CG27 CG28: "Cap Ceramic 0.1uF 35V X7R 20% Pad SMD 0402 125C Automotive T/R", Capacitance=100nF, Case Code (Imperial)=0402, Case Code (Metric)=1005, Dielectric=X7R, Manufacturer=TDK, Manufacturer Part Number=CGA2B3X7R1V104M050BB, Max Operating Temperature=125°C, Min Operating Temperature=-55°C, Package Quantity=10000, Ratings=AEC-Q200, Supplier Part Number 1=445-12264-1-ND, Tolerance=20%, Voltage Rating=35V, Case/Package=0402, Category="Ceramic Capacitors", ComponentLink1Description=http://www.mouser.com/ds/2/400/lcc_automotive_general_en-843974.pdf?src-supplier=Mouser, ComponentLink1URL=http://www.mouser.com/ds/2/400/lcc_automotive_general_en-843974.pdf?src-supplier=Mouser, ComponentLink2Description=https://product.tdk.com/info/en/catalog/datasheets/mlcc_automotive_general_en.pdf?src-supplier=Digi-Key, ComponentLink2URL=https://product.tdk.com/info/en/catalog/datasheets/mlcc_automotive_general_en.pdf?src-supplier=Digi-Key, ComponentLink3Description=https://product.tdk.com/info/en/documents/chara_sheet/CGA2B3X7R1V104M050BB.pdf?src-supplier=Digi-Key, ComponentLink3URL=https://product.tdk.com/info/en/documents/chara_sheet/CGA2B3X7R1V104M050BB.pdf?src-supplier=Digi-Key, ComponentLink4Description=http://product.tdk.com/en/catalog/datasheets/mlcc_automotive_general_en.pdf?src-supplier=Avnet, ComponentLink4URL=http://product.tdk.com/en/catalog/datasheets/mlcc_automotive_general_en.pdf?src-supplier=Avnet, Height=0.55mm, Length=0.039inch, Manufacturer_Name=TDK, Manufacturer_Part_Number=CGA2B3X7R1V104M050BB, Mount="Surface Mount", Packaging="Tape and Reel", Pricing 1="1=0.14000, 10=0.10200, 50=0.05780, 100=0.04780, 500=0.03356, 1000=0.02778, 2500=0.02585, 5000=0.02365 (USD)", RoHS=Yes, RoHS Compliant=Yes, Series=CGA, Stock 1=93877, Supplier 1=Digi-Key, Thickness=0.022inch, Voltage Rating (DC)=35V, Weight=2.3E-05oz, Width=0.02inch
Cin2: library part T494A106M020AT, "Cap Tant Solid 10uF 20V A CASE 20% (3.2 X 1.6 X 1.6mm) SMD 3216-18 3 Ohm 125C T/R", Case Code (Imperial)=1206, Case Code (Metric)=3216, ESR (Equivalent Series Resistance)=3R, Leakage Current=2uA, Manufacturer=KEMET, Manufacturer_Name=Kemet, Max Operating Temperature=125°C, Min Operating Temperature=-55°C, Package Quantity=1, Ripple Current=158mA, Supplier Part Number 1=399-5157-1-ND, Tolerance=20%, Voltage Rating=20V, Capacitance=10uF, Case/Package=1206, Category="Tantalum Capacitors", ComponentLink1Description=https://datasheet.ciiva.com/22691/1778347-22691442.pdf?src-supplier=Element14, ComponentLink1URL=https://datasheet.ciiva.com/22691/1778347-22691442.pdf?src-supplier=Element14, ComponentLink2Description=https://datasheet.ciiva.com/258/kem-t2008-t494-258774.pdf?src-supplier=Digi-Key, ComponentLink2URL=https://datasheet.ciiva.com/258/kem-t2008-t494-258774.pdf?src-supplier=Digi-Key, ComponentLink3Description=https://datasheet.ciiva.com/258/kem-t2008-t494-258775.pdf?src-supplier=Digi-Key, ComponentLink3URL=https://datasheet.ciiva.com/258/kem-t2008-t494-258775.pdf?src-supplier=Digi-Key, ComponentLink4Description=https://datasheet.ciiva.com/258/kem-t2008-t494-258776.pdf?src-supplier=Digi-Key, ComponentLink4URL=https://datasheet.ciiva.com/258/kem-t2008-t494-258776.pdf?src-supplier=Digi-Key, Construction=Flat, Datasheet Link=https://componentsearchengine.com/Datasheets/2/T494A106M020AT.pdf, Depth=1.6mm, Dissipation Factor=10%, Features="General Purpose", Height=1.8mm, Height - Seated (Max)=0.071inch, Length=3.2mm, Life (Hours)=2000Hour, Manufacturer Part Number=T494A106M020AT, Manufacturer_Part_Number=T494A106M020AT, Mount="Surface Mount", Packaging="Tape and Reel", Polarity=Polar, Pricing 1="1=0.85000, 10=0.64900, 50=0.53900, 100=0.46420, 500=0.35936, 1000=0.30946 (USD)", Radiation Hardening=No, REACH SVHC="No SVHC", RoHS=Yes, RoHS Compliant=Yes, Series=T494, Stock 1=10000, Supplier 1=Digi-Key, Termination=SMD/SMT, Voltage Rating (DC)=20V, Width=1.6mm
CON1: "Connector", Manufacturer="TE Connectivity", Supplier Part Number 1=A145376-ND, Datasheet Link=https://componentsearchengine.com/Datasheets/1/2350513-6.pdf, Height=8.6mm, Manufacturer Part Number=2350513-6, Manufacturer_Name="TE Connectivity", Manufacturer_Part_Number=2350513-6, Pricing 1="1=1.16000, 10=0.81200, 25=0.75720, 50=0.68740, 100=0.68430, 250=0.57788, 500=0.54748, 1000=0.48664, 5000=0.39540 (USD)", RoHS=Yes, Stock 1=2983, Supplier 1=Digi-Key
Csnu1 Csnu2 Csnu3: library part 224PPB250K, "CAP FILM 0.22UF 10% 250VDC RAD", Capacitance=220nF, Case/Package=Radial, Dielectric Material=PP, Manufacturer="CDE Illinois Capacitor", Manufacturer_Name="ILLINOIS CAPACITOR", Max Operating Temperature=105°C, Min Operating Temperature=-55°C, Mouser Part Number=598-224PPB250K, Supplier Part Number 1=1572-1375-ND, Tolerance=10%, Voltage Rating=250V, Voltage Rating (AC)=160V, Category="Film Capacitors", ComponentLink1Description=https://datasheet.ciiva.com/23627/1658054-23627330.pdf?src-supplier=Newark, ComponentLink1URL=https://datasheet.ciiva.com/23627/1658054-23627330.pdf?src-supplier=Newark, ComponentLink2Description=https://datasheet.ciiva.com/16310/ppb-16310486.pdf?src-supplier=Future+Electronics, ComponentLink2URL=https://datasheet.ciiva.com/16310/ppb-16310486.pdf?src-supplier=Future+Electronics, Datasheet Link=https://componentsearchengine.com/Datasheets/1/224PPB250K.pdf, Height=15mm, Height - Seated (Max)=0.591inch, Lead Free="Lead Free", Lead Pitch=0.886inch, Length=1.043inch, Manufacturer Part Number=224PPB250K, Manufacturer_Part_Number=224PPB250K, Mount="Through Hole,PCB", Mouser Price/Stock=https://www.mouser.com/Search/Refine.aspx?Keyword=598-224PPB250K, Packaging=Bulk, Pricing 1="1=1.84000, 10=1.44900, 50=1.25580, 100=1.08680, 500=0.82110, 1000=0.72450, 2500=0.67620, 5000=0.65205 (USD)", RoHS=Yes, Series=PPB, Stock 1=173, Supplier 1=Digi-Key, Termination="PC Pins", Voltage Rating (DC)=250V, Width=0.236inch
DG1 DG2 DG3 DG4 DG5 DG6: "VISHAY - BAS85-GS08 - Small Signal Schottky Diode, Single, 30 V, 200 mA, 800 mV, 600 mA, 125 °C", Average Rectified Current=200mA, Current Rating=200A, Forward Voltage=800mV, Manufacturer="Vishay Semiconductors", Manufacturer_Name=Vishay, Max Forward Surge Current (Ifsm)=600mA, Max Operating Temperature=125°C, Max Repetitive Reverse Voltage (Vrrm)=30V, Max Reverse Current=2uA, Min Operating Temperature=-55°C, Package Quantity=1, Power Dissipation=200mW, Supplier Part Number 1=70062025, Category="Rectifier Diodes", ComponentLink1Description=https://datasheet.ciiva.com/1202/1354484-1202985.pdf?src-supplier=Farnell, ComponentLink1URL=https://datasheet.ciiva.com/1202/1354484-1202985.pdf?src-supplier=Farnell, ComponentLink2Description=https://datasheet.ciiva.com/4715/bas85-88986-4715157.pdf?src-supplier=Mouser, ComponentLink2URL=https://datasheet.ciiva.com/4715/bas85-88986-4715157.pdf?src-supplier=Mouser, ComponentLink3Description=https://datasheet.ciiva.com/17069/0900766b80de2cb8-17069417.pdf?src-supplier=Allied+Electronics, ComponentLink3URL=https://datasheet.ciiva.com/17069/0900766b80de2cb8-17069417.pdf?src-supplier=Allied+Electronics, ComponentLink4Description=https://datasheet.ciiva.com/1240/1749352-1240576.pdf?src-supplier=Newark, ComponentLink4URL=https://datasheet.ciiva.com/1240/1749352-1240576.pdf?src-supplier=Newark, ComponentLink5Description=https://datasheet.ciiva.com/13950/bas85-13950054.pdf?src-supplier=Digi-Key, ComponentLink5URL=https://datasheet.ciiva.com/13950/bas85-13950054.pdf?src-supplier=Digi-Key, ComponentLink6Description=https://datasheet.ciiva.com/13950/bas85-13950058.pdf?src-supplier=Digi-Key, ComponentLink6URL=https://datasheet.ciiva.com/13950/bas85-13950058.pdf?src-supplier=Digi-Key, ComponentLink7Description=https://datasheet.ciiva.com/8281/bas85-8281903.pdf?src-supplier=Avnet, ComponentLink7URL=https://datasheet.ciiva.com/8281/bas85-8281903.pdf?src-supplier=Avnet, ComponentLink8Description=https://datasheet.ciiva.com/16298/bas85-16298175.pdf?src-supplier=Future+Electronics, ComponentLink8URL=https://datasheet.ciiva.com/16298/bas85-16298175.pdf?src-supplier=Future+Electronics, ComponentLink9Description=https://datasheet.ciiva.com/16941/70061833-16941564.pdf?src-supplier=Allied+Electronics, ComponentLink9URL=https://datasheet.ciiva.com/16941/70061833-16941564.pdf?src-supplier=Allied+Electronics, ComponentLink10Description=https://datasheet.ciiva.com/25936/bas85-25936302.pdf?src-supplier=Avnet+Europe, ComponentLink10URL=https://datasheet.ciiva.com/25936/bas85-25936302.pdf?src-supplier=Avnet+Europe, Contact Plating=Tin,Silver, Current=200mA, Datasheet Link=https://www.vishay.com/docs/85510/bas85.pdf, Diameter=1.6mm, Element Configuration=Single, Forward Current=200mA, Height=1.6mm, Lead Free="Lead Free", Length=0.145inch, Manufacturer Part Number=BAS85-GS08, Manufacturer_Part_Number=BAS85-GS08, Max Reverse Leakage Current=2uA, Max Reverse Voltage (DC)=30V, Max Surge Current=600mA, Mount="Surface Mount", Number of Pins=2, Packaging="Tape and Reel", Peak Non-Repetitive Surge Current=600mA, Pricing 1="1=0.06300, 12500=0.06000, 625000=0.05900 (USD)", Radiation Hardening=No, REACH SVHC=Unknown, Recovery Time=5ns, Reverse Recovery Time=5ns, RoHS=Yes, RoHS Compliant=Yes, Stock 1=12500, Supplier 1="Allied Electronics", Voltage=30V, Width=1.6mm
DZ1 DZ2 DZ3 DZ4 DZ5 DZ6 DZ7 DZ8 DZ10 DZ11 DZ12 DZ13: "NEXPERIA - BZV55-C15,115 - ZENER-DIODE, 15V, 0.5W, SOD-80C-2", Manufacturer=Nexperia, Manufacturer Part Number=BZV55-C15,115, Manufacturer_Name=LITTELFUSE, Supplier Part Number 1=1727-4962-1-ND, Category="Zener Diodes", ComponentLink1Description=http://www.farnell.com/datasheets/1498690.pdf?src-supplier=Farnell, ComponentLink1URL=http://www.farnell.com/datasheets/1498690.pdf?src-supplier=Farnell, ComponentLink2Description=https://assets.nexperia.com/documents/data-sheet/BZV55_SER.pdf?src-supplier=Digi-Key, ComponentLink2URL=https://assets.nexperia.com/documents/data-sheet/BZV55_SER.pdf?src-supplier=Digi-Key, Datasheet Link=https://www.arrow.com/en/products/sma6j5.0a/littelfuse, Height=2.29mm, Manufacturer_Part_Number=SMA6J5.0A, Pricing 1="1=0.19000, 10=0.17500, 100=0.09520, 500=0.05856, 1000=0.03993 (USD)", RoHS=Yes, RoHS Compliant=Yes, Stock 1=165, Supplier 1=Digi-Key
GD1 GD2 GD3 GD4 GD5 GD6: "Optocoupler Drive Push-Pull 1-CH 30V 1500V 8-Pin PDIP", Case/Package=PDIP, Forward Current=25mA, Forward Voltage=1.5V, High Level Output Current=2A, Isolation Voltage=3.75kV, Manufacturer="Broadcom Avago", Manufacturer_Name="Avago Technologies", Max Operating Temperature=100°C, Max Output Current=2.5A, Max Power Dissipation=295mW, Min Operating Temperature=-40°C, Mouser2 Part Number=630-HCPL-3120, Package Quantity=50, Reverse Breakdown Voltage=5V, Supplier Part Number 1=516-1121-5-ND, Approvals=CSA,UR, Category=Optocouplers, ComponentLink1Description=https://datasheet.ciiva.com/19453/1550434-19453924.pdf?src-supplier=Jameco, ComponentLink1URL=https://datasheet.ciiva.com/19453/1550434-19453924.pdf?src-supplier=Jameco, ComponentLink2Description=https://datasheet.ciiva.com/15119/getdatasheetpartid-141584-15119757.pdf?src-supplier=Verical, ComponentLink2URL=https://datasheet.ciiva.com/15119/getdatasheetpartid-141584-15119757.pdf?src-supplier=Verical, Datasheet Link=https://docs.broadcom.com/docs/AV02-0161EN, Direction=Unidirectional, Fall Time=0.1us, Height=4.7mm, Input Type=DC, Lead Free="Contains Lead", Low Level Output Current=2A, Manufacturer Part Number=HCPL-3120, Manufacturer_Part_Number=HCPL-3120, Mount="Through Hole", Mouser2 Price/Stock=https://www.mouser.com/Search/Refine.aspx?Keyword=630-HCPL-3120, Number of Channels=1, Number of Elements=1, Number of Pins=8, Output Type=PUSH-PULL, Packaging=Rail/Tube, Power Dissipation=295mW, Pricing 1="1=4.42000, 10=3.12300, 100=2.55790, 500=2.15642, 1000=2.10450 (USD)", Propagation Delay=500ns, Pulse Width Distortion (PWD)=300ns, Radiation Hardening=No, Rise Time=100ns, RoHS=No, RoHS Compliant=No, Series=-, Stock 1=3108, Supplier 1=Digi-Key, Turn-On Delay Time=500ns
HS1 HS2 HS3: "Heatsink,  TO-247,  75 x 20.47 x 38mm,  Spring Clip Mount", Case/Package=TO-247, Color=Black, Manufacturer=Ohmite, Natural Thermal Resistance=2°C/W, Package Quantity=5, Supplier Part Number 1=C247-075-3AE-ND, Category="Heat Sinks", ComponentLink1Description=https://datasheet.ciiva.com/1347/1491991-1347537.pdf?src-supplier=Element14, ComponentLink1URL=https://datasheet.ciiva.com/1347/1491991-1347537.pdf?src-supplier=Element14, ComponentLink2Description=https://datasheet.ciiva.com/30237/c-sink-30237933.pdf?src-supplier=Onlinecomponents.com, ComponentLink2URL=https://datasheet.ciiva.com/30237/c-sink-30237933.pdf?src-supplier=Onlinecomponents.com, ComponentLink3Description=https://datasheet.ciiva.com/16151/c-sink-16151064.pdf?src-supplier=Onlinecomponents.com, ComponentLink3URL=https://datasheet.ciiva.com/16151/c-sink-16151064.pdf?src-supplier=Onlinecomponents.com, ComponentLink4Description=https://datasheet.ciiva.com/14543/70024778-14543773.pdf?src-supplier=Allied+Electronics, ComponentLink4URL=https://datasheet.ciiva.com/14543/70024778-14543773.pdf?src-supplier=Allied+Electronics, Datasheet Link=https://www.ohmite.com/assets/docs/sink_c.pdf, Finish=Anodized, Height=38mm, Height Off Base=0.71inch, Length=75mm, Manufacturer Part Number=C247-075-3AE, Manufacturer_Name=Ohmite, Manufacturer_Part_Number=C247-075-3AE, Material=Aluminium, Mount="PC Pin,Board,Clip", Package Cooled=TO-247, Packaging=Bulk, Pricing 1="1=10.28000, 10=9.99900, 25=9.44360, 50=8.88800, 100=8.33250, 250=7.77700, 500=7.22150, 1000=7.08262 (USD)", REACH SVHC=Unknown, RoHS=Yes, RoHS Compliant=Yes, Series=C, Shape=Fins,Rectangular, Stock 1=277, Supplier 1=Digi-Key, Termination=Radial, Thermal Resistance @ Forced Air Flow (100 LFM)=2°C/W, Type=Passive, Weight=1.6oz, Width=1.5inch
INVERSOR1 INVERSOR2 INVERSOR3 INVERSOR4 INVERSOR5 INVERSOR6 INVERSOR7 INVERSOR8 INVERSOR9: "IC INVERTER SCHMITT 1CH SOT5", Case/Package=SOT-553, High Level Output Current=-8mA, Low Level Output Current=8mA, Manufacturer="Texas Instruments", Max Operating Temperature=125°C, Max Supply Voltage=5.5V, Min Operating Temperature=-40°C, Min Supply Voltage=2V, Mouser2 Part Number=595-SN74AHC1G14DRLR, Operating Supply Voltage=5V, Package Quantity=4000, Quiescent Current=1uA, Supplier Part Number 1=296-23232-1-ND, Category="Logic Gates", ComponentLink1Description=https://datasheet.ciiva.com/1866/sn74ahc1g14-1866325.pdf?src-supplier=Digi-Key, ComponentLink1URL=https://datasheet.ciiva.com/1866/sn74ahc1g14-1866325.pdf?src-supplier=Digi-Key, Datasheet Link=http://www.ti.com/lit/gpn/sn74ahc1g14, Height=0.6mm, Input Type="SCHMITT TRIGGER", Lead Free="Lead Free", Logic Function="Inverting,Schmitt Trigger,Inverter", Manufacturer Part Number=SN74AHC1G14DRLR, Manufacturer_Name="Texas Instruments", Manufacturer_Part_Number=SN74AHC1G14DRLR, Mount="Surface Mount", Mouser2 Price/Stock=https://www.mouser.com/Search/Refine.aspx?Keyword=595-SN74AHC1G14DRLR, Number of Bits=1, Number of Circuits=1, Number of Elements=1, Number of Gates=1, Number of Inputs=1, Number of Pins=5, Packaging="Cut Tape", Pricing 1="1=0.51000, 10=0.41400, 25=0.37840, 100=0.28150, 250=0.25516, 500=0.21116, 1000=0.15836 (USD)", Propagation Delay=10.6ns, Radiation Hardening=No, RoHS=Yes, RoHS Compliant=Yes, Series=SN74AHC1G14, Stock 1=2029, Supplier 1=Digi-Key, Turn-On Delay Time=18.5ns, Weight=9.9E-05oz
J1 J2 J3 J4 J5 J6 J7 J8: library part 62409-1, "Quick Disconnect Terminal M 15.8mm 7.5mm Tin Over Copper Automotive Bag", Manufacturer="AMP - TE CONNECTIVITY", Supplier Part Number 1=A24742-ND, ComponentLink1Description=http://www.farnell.com/datasheets/1650963.pdf?src-supplier=Farnell, ComponentLink1URL=http://www.farnell.com/datasheets/1650963.pdf?src-supplier=Farnell, ComponentLink2Description=http://www.farnell.com/datasheets/1650963.pdf?src-supplier=Element14, ComponentLink2URL=http://www.farnell.com/datasheets/1650963.pdf?src-supplier=Element14, ComponentLink3Description=http://www.farnell.com/datasheets/1650963.pdf?src-supplier=Newark, ComponentLink3URL=http://www.farnell.com/datasheets/1650963.pdf?src-supplier=Newark, ComponentLink4Description=https://www.te.com/commerce/DocumentDelivery/DDEController?Action=srchrtrv&DocNm=62409&DocType=Customer+Drawing&DocLang=English&src-supplier=Digi-Key, ComponentLink4URL=https://www.te.com/commerce/DocumentDelivery/DDEController?Action=srchrtrv&DocNm=62409&DocType=Customer+Drawing&DocLang=English&src-supplier=Digi-Key, Manufacturer Part Number=62409-1, Pricing 1="1=0,19000, 10=0,17800, 25=0,15200, 50=0,13320, 100=0,12360, 250=0,10936, 750=0,09035, 1500=0,08083, 8000=0,06895 (USD)", RoHS=No, Stock 1=8729, Supplier 1=Digi-Key
Q1 Q2 Q3 Q4 Q5 Q6: "MOSFET 600V N-Channel MOSFET, FRFET", Case/Package=TO-247-3, Continuous Drain Current (ID)=76A, Drain to Source Breakdown Voltage=600V, Drain to Source Resistance=36mR, Gate to Source Voltage (Vgs)=20V, Input Capacitance=14.365nF, Manufacturer="ON Semiconductor / Fairchild", Max Operating Temperature=150°C, Max Power Dissipation=595W, Min Operating Temperature=-55°C, Package Quantity=30, Supplier Part Number 1=FCH041N60F-ND, Category=MOSFETs, ComponentLink1Description=https://datasheet.ciiva.com/15043/fch041n60f-15043778.pdf?src-supplier=Digi-Key, ComponentLink1URL=https://datasheet.ciiva.com/15043/fch041n60f-15043778.pdf?src-supplier=Digi-Key, ComponentLink2Description=https://datasheet.ciiva.com/13058/fch041n60f-226495-13058758.pdf?src-supplier=Mouser, ComponentLink2URL=https://datasheet.ciiva.com/13058/fch041n60f-226495-13058758.pdf?src-supplier=Mouser, ComponentLink3Description=https://datasheet.ciiva.com/28425/fch041n60f-28425574.pdf?src-supplier=Avnet+Europe, ComponentLink3URL=https://datasheet.ciiva.com/28425/fch041n60f-28425574.pdf?src-supplier=Avnet+Europe, Contact Plating=Tin,Matte, Drain to Source Voltage (Vdss)=600V, Element Configuration=Single, Fall Time=53ns, Height=20.82mm, Lead Free="Lead Free", Length=15.87mm, Manufacturer Part Number=FCH041N60F, Mount="Through Hole", Number of Elements=1, Number of Pins=3, Packaging=Rail/Tube, Polarity=N-CHANNEL, Power Dissipation=595W, Pricing 1="1=9.07000, 10=8.19600, 25=7.81480, 100=6.78560, 500=6.06480 (USD)", Radiation Hardening=No, Rds On Max=41mR, Rise Time=66ns, RoHS=Yes, RoHS Compliant=Yes, Series=SuperFETII®, Stock 1=1157, Supplier 1=Digi-Key, Turn-Off Delay Time=244ns, Turn-On Delay Time=63ns, Weight=6.39g, Width=4.82mm